# Allegro board fc.brd
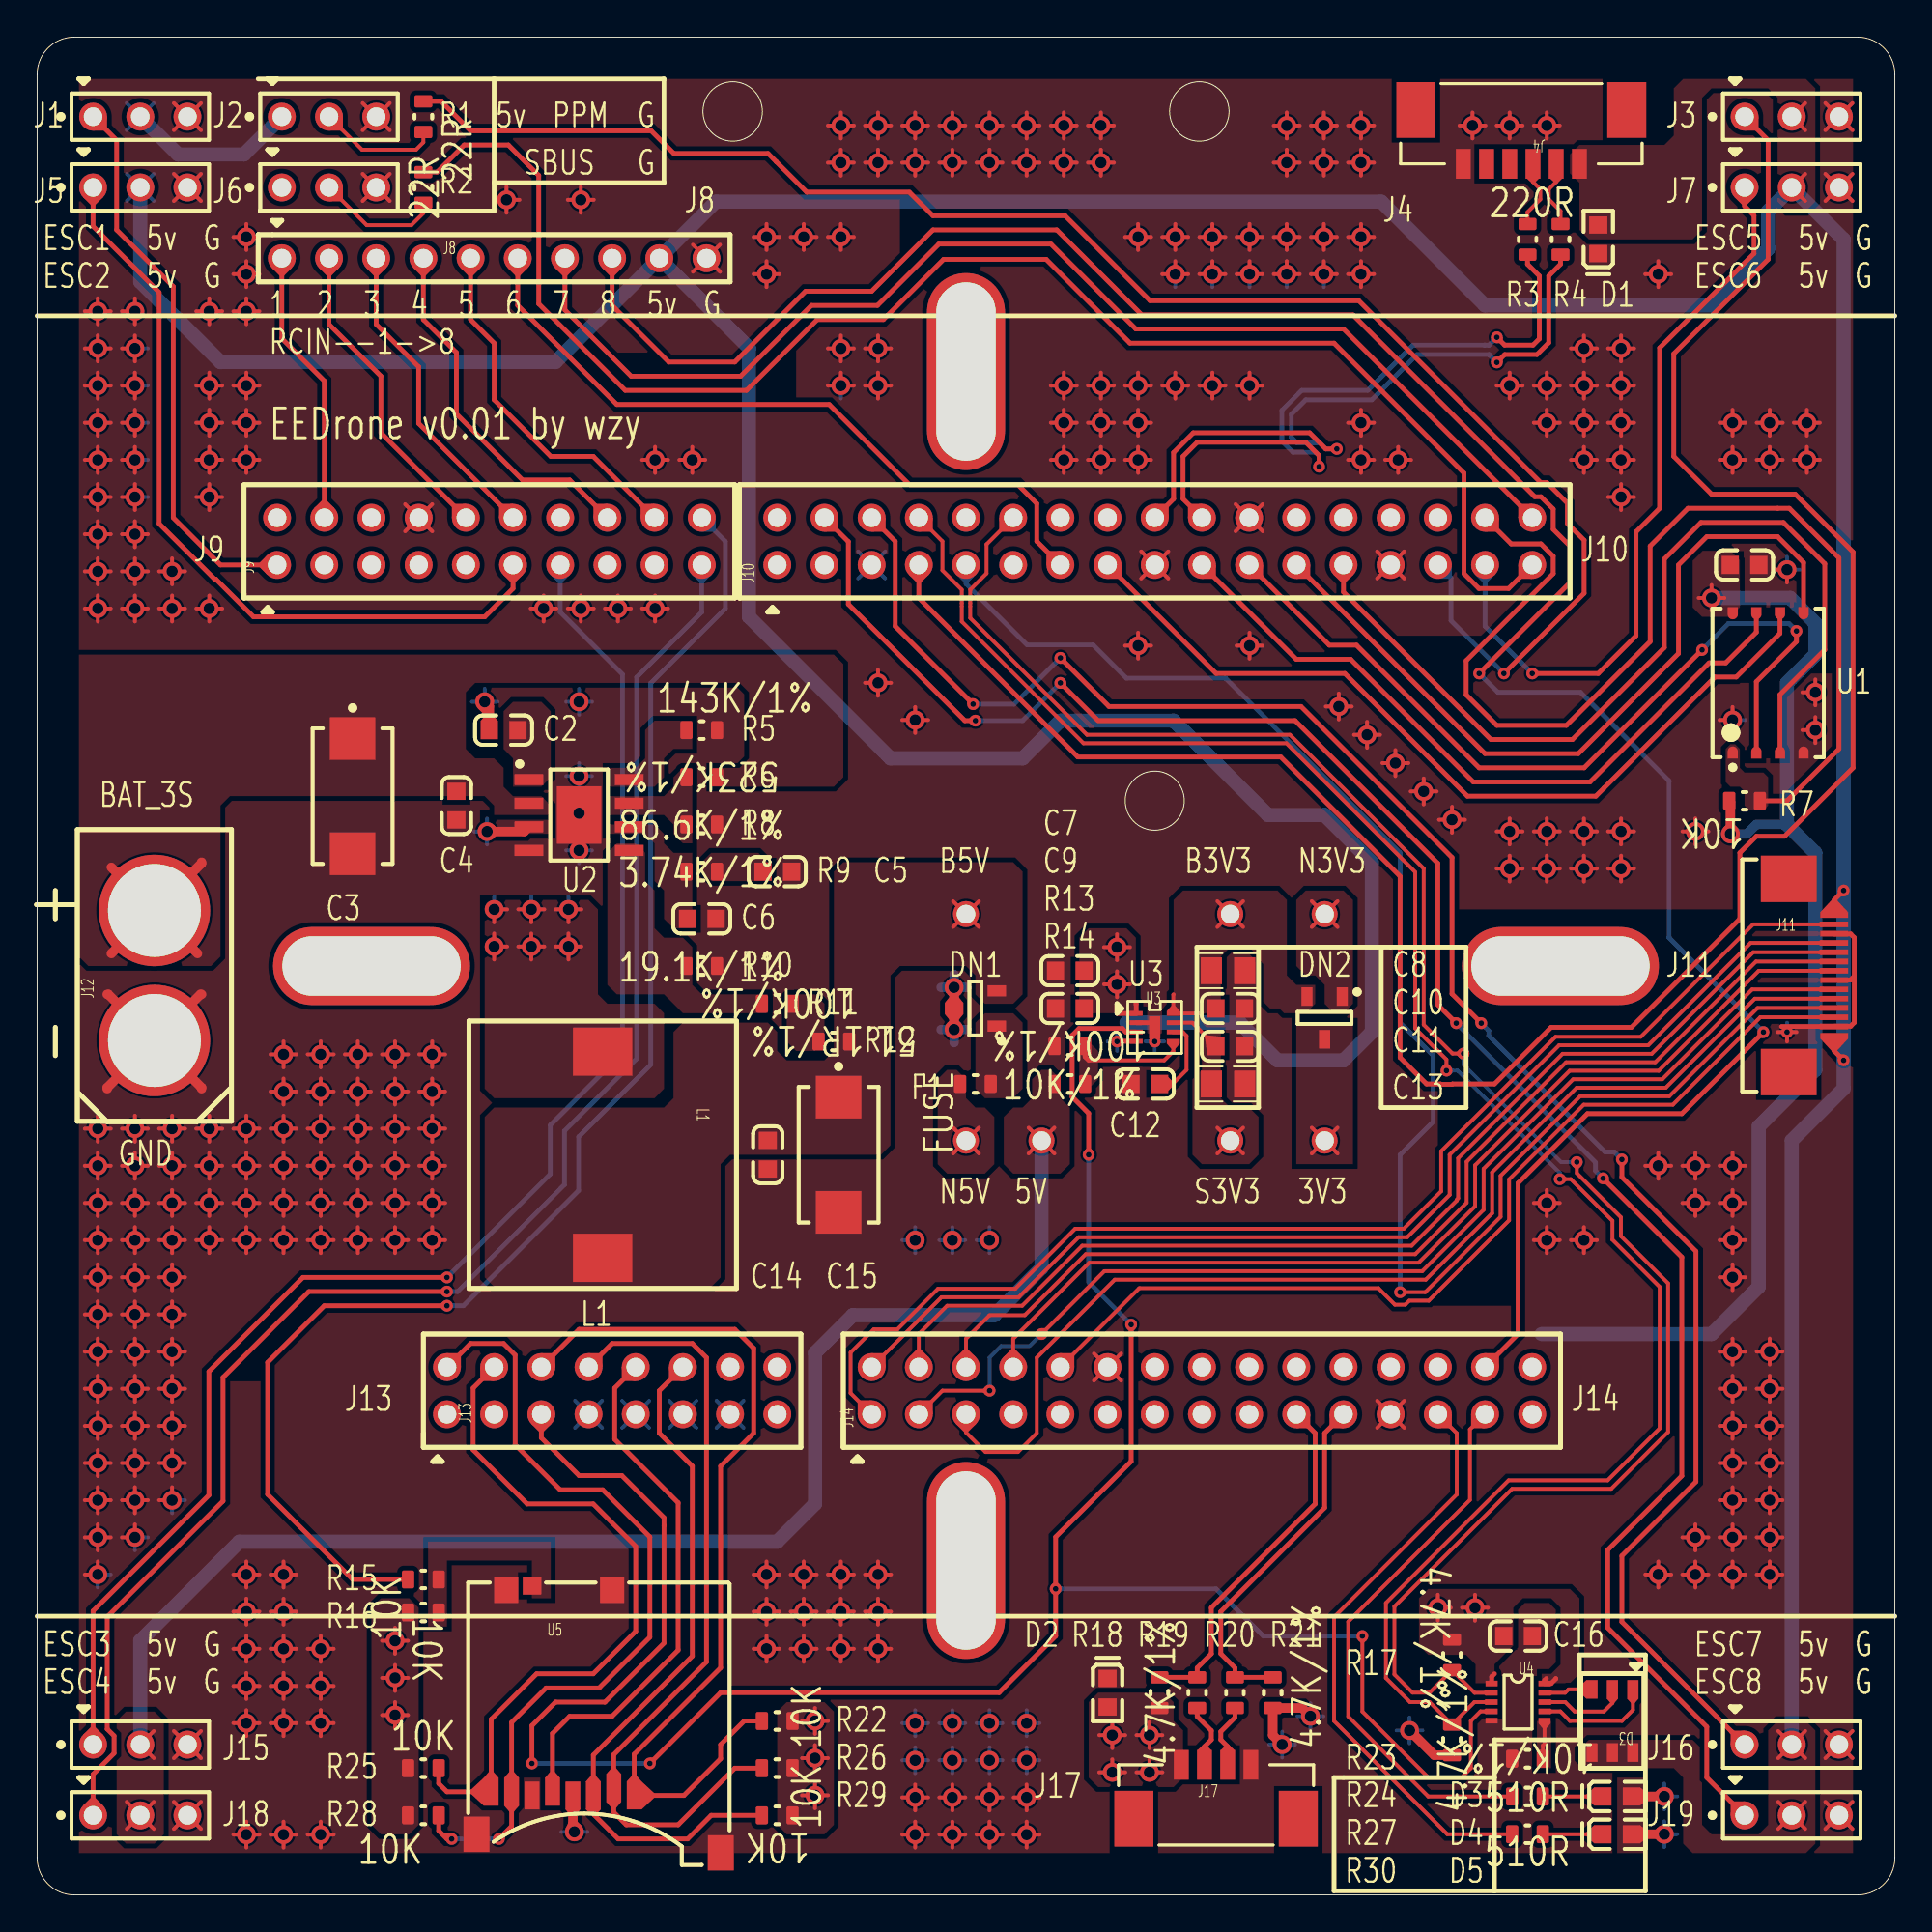
[diagram p0: board, top side]
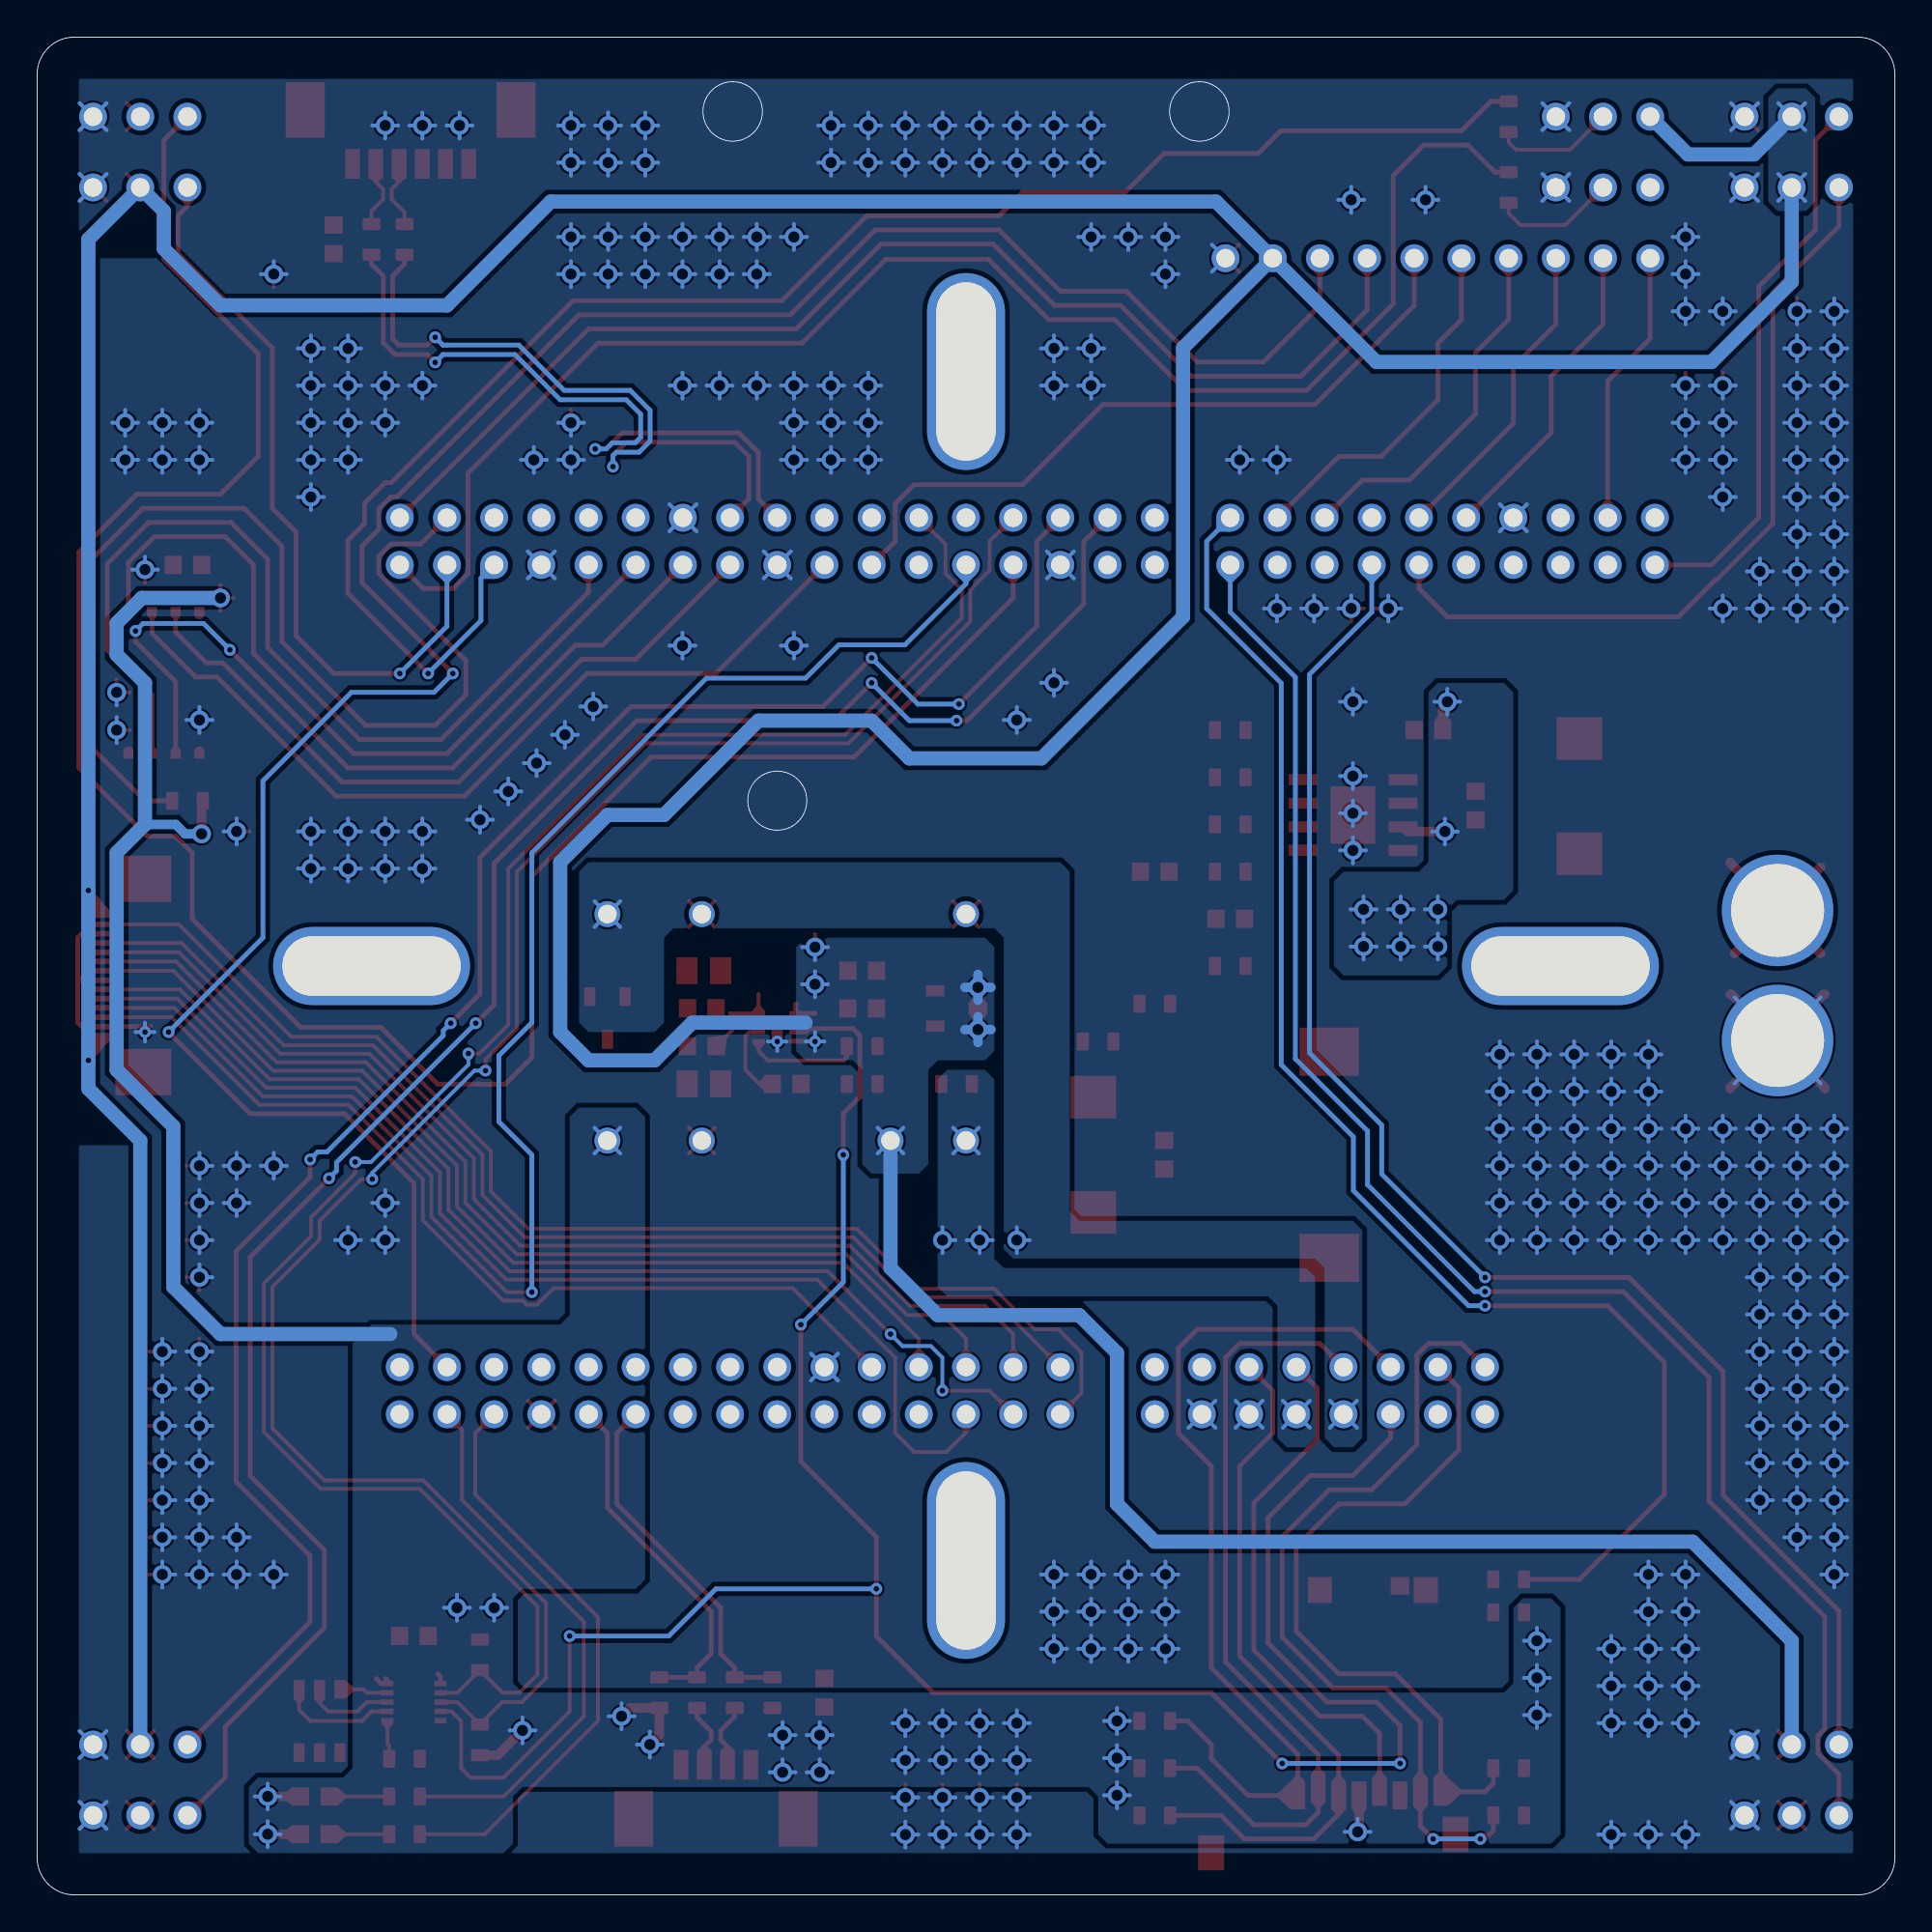
[diagram p1: board, bottom side, seen from below]

Outline 100 x 100 mm; copper layers: TOP, BOTTOM. Coordinates in mm from the lower left corner of the outline.
Outline path: circle c37.44,96 r1.6 ; circle c60.16,58.9 r1.59 ; circle c62.56,96 r1.6 ; 0,98 0,2 arc(0.59,0.59) 2,0 98,0 arc(99.41,0.59) 100,2 100,98 arc(99.41,99.41) 98,100 2,100 arc(0.59,99.41) 0,98

## Design rules (mm)
net group DIFFPAIR0: nets N25219 N25223
net group DIFFPAIR1: nets UART7_RX UART7_TX
net group DIFFPAIR2: nets N25610 N25614
net group DIFFPAIR3: nets IIC2_SCL IIC2_SDA
net group DIFFPAIR4: nets IIC4_SCL IIC4_SDA

## Placement (name value [footprint] x y rotation side)
C1  0.1uF  [CAP0603]  91.91 71.59 0 top
C2  0.1uF/50V  [CAP0603]  25.11 62.7 180 top
C3  100uF/25V  [CAPMP7343X430N]  16.98 59.14 270 top
C4  0.1uF/50V  [CAP0603]  22.57 58.64 270 top
C5  12nF/16V  [CAP0603]  39.84 55.08 0 top
C6  120pF/50V  [CAP0603]  35.78 52.54 0 top
C7  10uF/25V  [CAP0603]  55.59 49.75 180 top
C8  22uF/25V  [CAP0805]  63.21 49.75 0 top
C9  0.1uF/50V  [CAP0603]  55.59 47.71 180 top
C10  0.1uF/50V  [CAP0603]  64.22 47.71 0 top
C11  0.1uF/50V  [CAP0603]  64.22 45.68 0 top
C12  0.01uF/50V  [CAP0603]  59.65 43.65 180 top
C13  22uF/25V  [CAP0805]  63.21 43.65 0 top
C14  0.1uF/50V  [CAP0603]  39.33 39.84 270 top
C15  100uF/16V  [CAPMP7343X430N]  43.14 39.84 270 top
C16  0.1uF  [CAP0603]  79.72 13.93 0 top
D1  TVS202-XGD10603  [LED0603]  84.04 89.12 90 top
D2  TVS202-XGD10603  [LED0603]  57.62 10.88 270 top
D3  3LEDs  [LED3535]  84.8 9.36 180 top
D4  LED  [LED0603]  85.05 5.3 0 top
D5  LED  [LED0603]  85.05 3.26 0 top
DN1  PMEG2005CT  [PMEG2005CT_TO-236AB]  50.51 47.71 180 top
DN2  PMEG2005CT  [PMEG2005CT_TO-236AB]  69.3 47.21 270 top
F1  FUSE  [RES0603]  50.51 43.65 180 top
J1  HEADER 3  [HEADER3X1_254]  3.01 95.72 0 top
J2  HEADER 3  [HEADER3X1_254]  13.17 95.72 0 top
J3  HEADER 3  [HEADER3X1_254]  91.91 95.72 0 top
J4  HEADER 6  [J_JAT_A1250WV_S-06P]  83.02 93.18 180 top
J5  HEADER 3  [HEADER3X1_254]  3.01 91.91 0 top
J6  HEADER 3  [HEADER3X1_254]  13.17 91.91 0 top
J7  HEADER 3  [HEADER3X1_254]  91.91 91.91 0 top
J8  RC_IN  [HEADER10X1_254]  24.6 88.1 0 top
J9  HEADER 10X2  [HEADER2X10_254]  24.35 72.86 90 top
J10  HEADER 17X2  [HEADER2X17_254]  60.16 72.86 90 top
J11  FPC  [FPC14_PITCH0_50]  96.74 49.49 0 top
J12  BAT_3S  [XT60]  6.31 49.49 90 top
J13  HEADER 8X2  [HEADER8X2_254]  30.95 27.14 90 top
J14  HEADER 15X2  [HEADER2X15_254]  62.7 27.14 90 top
J15  HEADER 3  [HEADER3X1_254]  3.01 8.09 0 top
J16  HEADER 3  [HEADER3X1_254]  91.91 8.09 0 top
J17  HEADER 4  [J_JAT_A1250WV_S-04P]  63.46 5.55 0 top
J18  HEADER 3  [HEADER3X1_254]  3.01 4.28 0 top
J19  HEADER 3  [HEADER3X1_254]  91.91 4.28 0 top
L1  15uH/4.7A  [SLF12575T-150M4R7]  30.44 39.84 270 top
NOREF  -  []  2 98 0 top
NOREF#2  -  [unnamed#2]  50 82 90 top
NOREF#3  -  []  2 2 90 top
NOREF#4  -  []  0.54 99.36 0 top
NOREF#5  -  [unnamed#2]  50 18 90 top
NOREF#6  -  [unnamed#2]  18 50 0 top
NOREF#7  -  [unnamed#2]  82 50 0 top
R1  22R  [RES0603]  20.79 95.72 90 top
R2  22R  [RES0603]  20.79 91.91 90 top
R3  220R  [RES0603]  80.23 89.12 90 top
R4  220R  [RES0603]  82 89.12 90 top
R5  143K/1%  [RES0603]  35.78 62.7 0 top
R6  523K/1%  [RES0603]  35.78 60.16 180 top
R7  10K  [RES0603]  91.91 58.89 180 top
R8  86.6K/1%  [RES0603]  35.78 57.62 0 top
R9  3.74K/1%  [RES0603]  35.78 55.08 0 top
R10  19.1K/1%  [RES0603]  35.78 50 0 top
R11  100K/1%  [RES0603]  39.84 47.97 180 top
R12  51.1R/1%  [RES0603]  42.89 45.94 180 top
R13  100K/1%  [RES0603]  55.59 45.68 180 top
R14  10K/1%  [RES0603]  55.59 43.65 0 top
R15  10K  [RES0603]  20.79 16.98 180 top
R16  10K  [RES0603]  20.79 15.2 0 top
R17  4.7K/1%  [RES0603]  76.16 12.92 270 top
R18  4.7K/1%  [RES0603]  60.41 10.88 90 top
R19  220R  [RES0603]  62.45 10.88 270 top
R20  220R  [RES0603]  64.48 10.88 270 top
R21  4.7K/1%  [RES0603]  66.51 10.88 90 top
R22  10K  [RES0603]  39.84 9.36 180 top
R23  4.7K/1%  [RES0603]  76.16 8.34 90 top
R24  10K/1%  [RES0603]  80.23 7.33 180 top
R25  10K  [RES0603]  20.79 6.82 0 top
R26  10K  [RES0603]  39.84 6.82 180 top
R27  510R  [RES0603]  80.23 5.3 0 top
R28  10K  [RES0603]  20.79 4.28 0 top
R29  10K  [RES0603]  39.84 4.28 180 top
R30  510R  [RES0603]  80.23 3.26 0 top
TP1  T POINT R  [TESTPOINT]  64.22 52.79 0 top
TP2  T POINT R  [TESTPOINT]  50 52.79 0 top
TP3  T POINT R  [TESTPOINT]  69.3 52.79 0 top
TP4  T POINT R  [TESTPOINT]  50 40.6 0 top
TP5  T POINT R  [TESTPOINT]  54.06 40.6 0 top
TP6  T POINT R  [TESTPOINT]  64.22 40.6 0 top
TP7  T POINT R  [TESTPOINT]  69.3 40.6 0 top
U1  MX25L51245G  [MX25L51245G_WSON8]  93.18 65.24 90 top
U2  TPS54335ADDAR  [TPS54335A_SOP8POWER]  29.17 58.13 0 top
U3  MIC5332-3.3/3.3YMT  [MIC5532_MLF8]  60.16 46.7 0 top
U4  TCA62724FMG  [TCA62724FMG_SON10]  79.72 10.38 0 top
U5  molex_microsd  [MOLEX_MICROSD]  24.6 15.71 0 top

## Library data of the parts
C1 C2 C4-C14 C16 = CAP NP
C3 C15 = CAP POL
D1 D2 = DIODE BI-DIR TRIG
D3 = 3LEDs_0
D4 D5 = LED
DN1 DN2 = DIODE_DUAL_CK_AAJ
F1 = FUSE: Tolerance: RichardLC; User Part Number: partnum
J1-J3 J5-J7 J15 J16 J18 J19 = HEADER 3
J4 = HEADER 6
J8 = HEADER 10
J9 = HEADER 10X2
J10 = HEADER 17X2
J11 = HEADER 14
J12 = HEADER 2
J13 = HEADER 8X2
J14 = HEADER 15X2
J17 = HEADER 4
L1 = INDUCTOR
R1-R30 = R: Tolerance: RichardLC; User Part Number: partnum
TP1-TP7 = T POINT R
U1 = MX25L51245G
U2 = TPS54335ADDAR_1
U3 = MIC5332-3.3/3.3YMT
U4 = TCA62724FMG
U5 = molex_microsd

## Footprints (pads in the part's own frame, mm; a bottom-side part is the same pattern mirrored in y, then rotated)
CAP0603
  rect 0.93x0.98 smd: 1(-0.77,0) 2(0.77,0)
CAP0805
  rect 1.143x1.448 smd: 1(0,0) 2(1.8,0)
CAPMP7343X430N
  rect 2.3x2.45 smd: 1(-3.1,0) 2(3.1,0)
FPC14_PITCH0_50
  rect 3x2.5 smd: (-2.45,5.2) (-2.45,-5.2)
  rect 1.5x0.3 smd: 1(0,3.25) 2(0,2.75) 3(0,2.25) 4(0,1.75) 5(0,1.25) 6(0,0.75) 7(0,0.25) 8(0,-0.25) 9(0,-0.75) 10(0,-1.25) 11(0,-1.75) 12(0,-2.25) 13(0,-2.75) 14(0,-3.25)
HEADER2X10_254
  round 1.5 hole 1: 1(-1.27,11.43) 2(1.27,11.43) 3(-1.27,8.89) 4(1.27,8.89) 5(-1.27,6.35) 6(1.27,6.35) 7(-1.27,3.81) 8(1.27,3.81) 9(-1.27,1.27) 10(1.27,1.27) 11(-1.27,-1.27) 12(1.27,-1.27) 13(-1.27,-3.81) 14(1.27,-3.81) 15(-1.27,-6.35) 16(1.27,-6.35) 17(-1.27,-8.89) 18(1.27,-8.89) 19(-1.27,-11.43) 20(1.27,-11.43)
HEADER2X15_254
  round 1.5 hole 1: 1(-1.27,17.78) 2(1.27,17.78) 3(-1.27,15.24) 4(1.27,15.24) 5(-1.27,12.7) 6(1.27,12.7) 7(-1.27,10.16) 8(1.27,10.16) 9(-1.27,7.62) 10(1.27,7.62) 11(-1.27,5.08) 12(1.27,5.08) 13(-1.27,2.54) 14(1.27,2.54) 15(-1.27,0) 16(1.27,0) 17(-1.27,-2.54) 18(1.27,-2.54) 19(-1.27,-5.08) 20(1.27,-5.08) 21(-1.27,-7.62) 22(1.27,-7.62) 23(-1.27,-10.16) 24(1.27,-10.16) 25(-1.27,-12.7) 26(1.27,-12.7) 27(-1.27,-15.24) 28(1.27,-15.24) 29(-1.27,-17.78) 30(1.27,-17.78)
HEADER2X17_254
  round 1.5 hole 1: 1(-1.27,20.32) 2(1.27,20.32) 3(-1.27,17.78) 4(1.27,17.78) 5(-1.27,15.24) 6(1.27,15.24) 7(-1.27,12.7) 8(1.27,12.7) 9(-1.27,10.16) 10(1.27,10.16) 11(-1.27,7.62) 12(1.27,7.62) 13(-1.27,5.08) 14(1.27,5.08) 15(-1.27,2.54) 16(1.27,2.54) 17(-1.27,0) 18(1.27,0) 19(-1.27,-2.54) 20(1.27,-2.54) 21(-1.27,-5.08) 22(1.27,-5.08) 23(-1.27,-7.62) 24(1.27,-7.62) 25(-1.27,-10.16) 26(1.27,-10.16) 27(-1.27,-12.7) 28(1.27,-12.7) 29(-1.27,-15.24) 30(1.27,-15.24) 31(-1.27,-17.78) 32(1.27,-17.78) 33(-1.27,-20.32) 34(1.27,-20.32)
HEADER3X1_254
  round 1.5 hole 1: 1(0,0) 2(2.54,0) 3(5.08,0)
HEADER8X2_254
  round 1.5 hole 1: 1(-1.27,8.89) 2(1.27,8.89) 3(-1.27,6.35) 4(1.27,6.35) 5(-1.27,3.81) 6(1.27,3.81) 7(-1.27,1.27) 8(1.27,1.27) 9(-1.27,-1.27) 10(1.27,-1.27) 11(-1.27,-3.81) 12(1.27,-3.81) 13(-1.27,-6.35) 14(1.27,-6.35) 15(-1.27,-8.89) 16(1.27,-8.89)
HEADER10X1_254
  round 1.5 hole 1: 1(-11.43,0) 2(-8.89,0) 3(-6.35,0) 4(-3.81,0) 5(-1.27,0) 6(1.27,0) 7(3.81,0) 8(6.35,0) 9(8.89,0) 10(11.43,0)
J_JAT_A1250WV_S-04P
  rect 2.1x3 smd: (-4.425,-1.45) (4.425,-1.45)
  rect 0.8x1.6 smd: 1(-1.875,1.45) 2(-0.625,1.45) 3(0.625,1.45) 4(1.875,1.45)
J_JAT_A1250WV_S-06P
  rect 2.1x3 smd: (-2.55,-2.9) (8.8,-2.9)
  rect 0.8x1.6 smd: 1(0,0) 2(1.25,0) 3(2.5,0) 4(3.75,0) 5(5,0) 6(6.25,0)
LED0603
  rect 0.93x0.98 smd: 1(-0.77,0) 2(0.77,0)
LED3535
  rect 0.6x1 smd: 1(-1.1,-1.7) 2(0,-1.7) 3(1.1,-1.7) 4(1.1,1.7) 5(0,1.7) 6(-1.1,1.7)
MIC5532_MLF8
  rect 0.7x0.25 smd: 1(-1,0.75) 2(-1,0.25) 3(-1,-0.25) 4(-1,-0.75) 5(1,-0.75) 6(1,-0.25) 7(1,0.25) 8(1,0.75)
  rect 0.6x1.2 smd: 9(0,0)
MOLEX_MICROSD
  rect 0.8x1.5 smd: 1(7.54,-10.36) 2(6.44,-9.96) 3(5.34,-10.36) 4(4.24,-10.36) 5(3.14,-10.16) 6(2.04,-10.36) 7(0.94,-10.16) 8(-0.16,-10.16)
  rect 1.4x1.9 smd: 9(-0.95,-12.45) 10(12.2,-13.45)
  rect 1.3x1.4 smd: 11(0.65,0.7) 12(6.35,0.7)
  rect 1x0.95 smd: 13(2.04,0.925)
MX25L51245G_WSON8
  custom 0.65x0.55 smd: 1(-3.75,1.905) 2(-3.75,0.635) 3(-3.75,-0.635) 4(-3.75,-1.905) 5(3.75,-1.905) 6(3.75,-0.635) 7(3.75,0.635) 8(3.75,1.905)
PMEG2005CT_TO-236AB
  rect 1x0.6 smd: 1(-1.15,0.95) 2(-1.15,-0.95) 3(1.15,0)
RES0603
  custom 0.66x0.966 smd: 1(-0.825,0) 2(0.825,0)
SLF12575T-150M4R7
  rect 2.6x3.2 smd: 1(-5.55,0) 2(5.55,0)
TCA62724FMG_SON10
  rect 0.65x0.3 smd: 1(-1.425,1) 2(-1.425,0.5) 3(-1.425,0) 4(-1.425,-0.5) 5(-1.425,-1) 6(1.425,-1) 7(1.425,-0.5) 8(1.425,0) 9(1.425,0.5) 10(1.425,1)
TESTPOINT
  round 1.4 hole 1: 1(0,0)
TPS54335A_SOP8POWER
  rect 1.55x0.6 smd: 1(-2.7,1.905) 2(-2.7,0.635) 3(-2.7,-0.635) 4(-2.7,-1.905) 5(2.7,-1.905) 6(2.7,-0.635) 7(2.7,0.635) 8(2.7,1.905)
  rect 2.4x3.1 smd: 9(0,0)
unnamed#2
  oval 10.6x4.2 hole 9.6x3.2 unplated: (0,0)
XT60
  round 6 hole 5: 1(-3.5,0) 2(3.5,0)

## Nets
+3V3: C1.1 C16.1 D2.2 D4.2(ANODE) D5.2(ANODE) DN2.3 J17.1 R7.2 R16.1 R17.1 R18.1 R21.1 R22.1 R23.1 R25.1 R26.1 R28.1 R29.1 TP7.1(TP) U1.8(VCC) U4.1(SHDN) U4.10(VIN) U5.4(VDD)
+5V: C7.1 C9.1 D1.2 D3.4(IN1+) D3.5(IN2+) D3.6(IN3+) DN1.3 J1.2 J2.1 J3.2 J4.1 J5.2 J7.2 J8.9 J11.1 J11.14 J15.2 J16.2 J18.2 J19.2 R14.1 TP5.1(TP) U3.1(VIN) U3.4(EN2)
AVDD: J9.6
GND: C1.2 C3.2 C4.2 C5.2 C6.2 C7.2 C8.2 C9.2 C10.2 C11.2 C12.2 C13.2 C14.2 C15.2 C16.2 D1.1 D2.1 J1.3 J2.3 J3.3 J4.6 J5.3 J6.3 J7.3 J8.10 J9.8 J10.5 J10.17 J10.22 J10.27 J11.3 J11.8 J11.13 J12.1 J13.11 J13.13 J14.12 J14.23 J15.3 J16.3 J17.4 J18.3 J19.3 R5.2 R8.2 R10.2 R13.2 R24.2 U1.4(GND) U2.4(GND) U2.9(PAD) U3.2(GND1) U3.9(GND2) U4.5(GND) U5.6(VSS) U5.9(GND1) U5.10(GND2) U5.11(GND3) U5.12(GND4)
VIN: J13.15
BAT_3S: C3.1 C4.1 J12.2 R6.1 U2.2(VIN)
BAT_3V3: C8.1 C10.1 DN2.2 TP1.1(TP) U3.8(VOUT1)
BAT_5V: C14.1 C15.1 DN1.2 L1.2 R12.1 TP2.1(TP)
ESC1_PWM: J1.1 J9.1
ESC2_PWM: J5.1 J9.11
ESC3_PWM: J9.13 J15.1
ESC4_PWM: J9.19 J18.1
ESC5_PWM: J3.1 J10.7
ESC6_PWM: J7.1 J10.31
ESC7_PWM: J10.6 J16.1
ESC8_PWM: J10.4 J19.1
IIC2_SCL: J14.19 R18.2 R19.1
IIC2_SDA: J14.21 R20.1 R21.2
IIC4_SCL: J10.8 R23.2 U4.3(SCL)
IIC4_SDA: J10.12 R17.2 U4.2(SDA)
IMU_6DSM_CS: J11.6 J14.6
IMU_6DSM_INT: J11.9 J14.3
IMU_303D_CS: J11.5 J14.4
IMU_ICM_CS: J11.7 J14.8
IMU_LPS_CS: J11.4 J14.2
IMU_PWM: J11.2 J14.1
LED0: J14.25 R30.1
LED1: J14.27 R27.1
NRST: J13.5 U3.3(POR2) U4.4(RESET)
NUC_3V3: DN2.1 J13.7 TP3.1(TP)
NUC_5V: F1.2 J13.9 TP4.1(TP)
PA4: J9.17
PA7: J9.14
PA15: J9.9
PB3: J9.15
PB8: J9.2
PB12: J9.7
PB13: J9.5
PB15: J9.3
PE3: J14.22
PE4: J14.16
PE5: J14.18
PE6: J14.20
PE10: J10.24
PE12: J10.26
PE13: J10.10
PE14: J10.28
PE15: J10.30
PF7: J14.26
PF8: J14.24
PF13: J10.2
PG0: J14.29
PG1: J14.30
PG2: J13.14
PG3: J13.16
PPM_IN: J10.29 R1.2
QSPI_CS: J10.32 R7.1 U1.1(CS#)
QSPI_D0: J10.23 U1.5(SIO0/SI)
QSPI_D1: J10.21 U1.2(SIO1/SO)
QSPI_D2: J10.25 U1.3(SIO2/WP#)
QSPI_D3: J10.19 U1.7(SIO3/RESET#)
QSPI_SCK: J10.15 U1.6(SCLK)
RC_IN1: J8.1 J9.4
RC_IN2: J8.2 J9.10
RC_IN3: J8.3 J9.12
RC_IN4: J8.4 J9.16
RC_IN5: J8.5 J9.18
RC_IN6: J8.6 J10.13
RC_IN7: J8.7 J10.34
RC_IN8: J8.8 J14.28
SBUS: J10.33 R2.2
SD_CD: J9.20 R15.2
SD_CLK: J13.10 U5.5(CLK/SCLK)
SD_CMD: J13.12 R29.2 U5.3(CMD/DI)
SD_D0: J13.2 R28.2 U5.7(DAT0/D0)
SD_D1: J13.4 R25.2 U5.8(DAT1/RSV)
SD_D2: J13.6 R22.2 U5.1(DAT2/RSV)
SD_D3: J13.8 R26.2 U5.2(CD/DAT3/CS)
SENSOR_3V3: C11.1 C13.1 TP6.1(TP) U3.7(VOUT2)
SPI2_MISO: J10.9 J11.11
SPI2_MOSI: J11.10 J14.5
SPI2_SCK: J11.12 J14.10
UART7_RX: J10.20 R3.1
UART7_TX: J10.18 R4.1
N17118: J2.2 R1.1
N17345: J6.2 R2.1
N18384: D3.3(IN1-) U4.9(OUT0)
N18423: D3.2(IN2-) U4.8(OUT1)
N18617: D3.1(IN3-) U4.7(OUT2)
N22861: R24.1 U4.6(REXT)
N25219: J4.2 R4.2
N25223: J4.3 R3.2
N25610: J17.2 R19.2
N25614: J17.3 R20.2
N28626: D5.1(CATHODE) R30.2
N28630: D4.1(CATHODE) R27.2
N29554: R15.1 R16.2 U5.13(NCD)
N34885: R6.2 R8.1 U2.7(EN)
N35030: R5.1 U2.8(RT)
N35279: C6.1 R9.1 U2.6(COMP)
N35287: C5.1 R9.2
N35410: C2.1 U2.1(BOOT)
N35439: C2.2 L1.1 U2.3(PH)
N35979: R11.1 R12.2
N35983: R10.1 R11.2 U2.5(VSNS)
N39122: C12.1 U3.6(CSET)
N39384: R13.1 R14.2 U3.5(EN1)
N41172: DN1.1 F1.1

Pads without a net: J4 4 5; J6 1; J10 1 3 11 14 16; J13 1 3; J14 7 9 11 13 14 15 17

## Via types
v1: diameter 0.635, hole 0.305, TOP to BOTTOM, 41 vias
v2: diameter 1.016, hole 0.61, TOP to BOTTOM, 326 vias

## Routing (per net, layer and track width the routed paths; a pad name or vN(x,y) marks a point on that pad's centre or on a via; arc(x,y) is an arc through that point)
+3V3: length 190
  TOP w0.203: v2(59.87,6.6) 60.57,6.6 ; v2(59.87,6.6) 59.18,6.6 ; v2(59.87,6.6) 59.87,7.3 ; 76.7,15.46 v2(77.4,15.46) ; v2(77.4,15.46) 77.4,16.15 ; v2(77.4,15.46) 77.4,14.76 ; v2(77.4,15.46) 78.1,15.46 ; 75.4,14.76 v2(75.4,15.46) ; v2(75.4,15.46) 76.1,15.46 ; v2(75.4,15.46) 74.7,15.46 ; v2(75.4,15.46) 75.4,16.15 ; v2(19.27,9.68) 19.27,10.38 ; v2(19.27,9.68) 19.27,8.98 ; v2(19.27,9.68) 19.96,9.68 ; v2(19.27,9.68) 18.57,9.68 ; 41.17,7.36 v2(41.87,7.36) ; v2(41.87,7.36) 42.57,7.36 ; v2(41.87,7.36) 41.87,6.66 ; v2(41.87,7.36) 41.87,8.06 ; 57.18,8.6 v2(57.87,8.6) ; v2(57.87,8.6) 58.57,8.6 ; v2(57.87,8.6) 57.87,7.9 ; v2(57.87,8.6) 57.87,9.3 ; 41.87,4.66 v2(41.87,5.36) ; v2(41.87,5.36) 41.87,6.06 ; v2(41.87,5.36) 41.17,5.36 ; v2(41.87,5.36) 42.57,5.36 ; 41.87,8.66 v2(41.87,9.36) ; v2(41.87,9.36) 41.17,9.36 ; v2(41.87,9.36) 41.87,10.06 ; v2(41.87,9.36) 42.57,9.36 ; v2(90.13,69.81) 90.83,69.81 ; v2(90.13,69.81) 90.13,70.51 ; v2(90.13,69.81) 90.13,69.11 ; v2(90.13,69.81) 89.43,69.81 ; v2(57.87,6.6) 58.57,6.6 ; v2(57.87,6.6) 57.87,7.3 ; v2(57.87,6.6) 57.18,6.6 ; v2(59.87,8.6) 59.87,9.3 ; v2(59.87,8.6) 59.87,7.9 ; v2(59.87,8.6) 59.18,8.6 ; v2(59.87,8.6) 60.57,8.6 ; TP7.1 70,41.3 ; TP7.1 68.61,39.91 ; TP7.1 70,39.91 ; TP7.1 68.61,41.3 ; 18.57,11.68 v2(19.27,11.68) ; v2(19.27,11.68) 19.27,12.38 ; v2(19.27,11.68) 19.27,10.98 ; v2(19.27,11.68) 19.96,11.68 ; v2(19.27,13.68) 19.96,13.68 ; v2(19.27,13.68) 19.27,14.38 ; v2(19.27,13.68) 19.27,12.98 ; v2(19.27,13.68) 18.57,13.68
  TOP w0.254: U4.1 78.29,11.74 78.45,11.9 ; 81.24,11.65 81.14,11.55 U4.10 81.5,11.38 81.75,11.63 81.75,11.65
  TOP w0.508: v2(68.54,9.61) 68.1,10.06 R21.1 66.51,8.6 v2(67.02,8.09) ; v2(87.59,5.3) D4.2 ; v2(73.88,8.85) 75.21,7.52 R23.1 ; R7.2 91.15,58.83 v2(91.15,57.11) ; U5.4 28.84,3.43 28.88,3.39 v2(28.92,3.39) ; D5.2 v2(87.59,3.26)
  BOTTOM w0.203: v2(87.59,3.26) 88.29,3.26 ; v2(87.59,3.26) 87.59,3.96 ; v2(87.59,3.26) 86.89,3.26 ; v2(87.59,3.26) 87.59,2.57 ; v2(53.26,7.24) 53.96,7.24 ; v2(53.26,7.24) 52.57,7.24 ; v2(53.26,7.24) 53.26,6.55 ; v2(53.26,7.24) 53.26,7.94 ; 41.87,4.66 v2(41.87,5.36) ; v2(41.87,5.36) 42.57,5.36 ; v2(41.87,5.36) 41.87,6.06 ; v2(41.87,5.36) 41.17,5.36 ; 19.27,10.98 v2(19.27,11.68) ; v2(19.27,11.68) 19.96,11.68 ; v2(19.27,11.68) 18.57,11.68 ; v2(19.27,11.68) 19.27,12.38 ; v2(75.4,15.46) 76.1,15.46 ; v2(75.4,15.46) 75.4,14.76 ; v2(75.4,15.46) 75.4,16.15 ; v2(75.4,15.46) 74.7,15.46 ; 18.57,9.68 v2(19.27,9.68) ; v2(19.27,9.68) 19.27,10.38 ; v2(19.27,9.68) 19.27,8.98 ; v2(19.27,9.68) 19.96,9.68 ; v2(57.87,8.6) 57.87,9.3 ; v2(57.87,8.6) 58.57,8.6 ; v2(57.87,8.6) 57.87,7.9 ; v2(57.87,8.6) 57.18,8.6 ; 52.57,9.24 v2(53.26,9.24) ; v2(53.26,9.24) 53.96,9.24 ; v2(53.26,9.24) 53.26,8.55 ; v2(53.26,9.24) 53.26,9.94 ; v2(49.26,9.24) 49.96,9.24 ; v2(49.26,9.24) 49.26,8.55 ; v2(49.26,9.24) 48.57,9.24 ; v2(49.26,9.24) 49.26,9.94 ; 67.84,9.61 v2(68.54,9.61) ; v2(68.54,9.61) 68.54,10.31 ; v2(68.54,9.61) 69.24,9.61 ; v2(68.54,9.61) 68.54,8.92 ; v2(59.87,6.6) 59.87,7.3 ; v2(59.87,6.6) 59.18,6.6 ; v2(59.87,6.6) 60.57,6.6 ; 28.22,3.39 v2(28.92,3.39) ; v2(28.92,3.39) 29.62,3.39 ; v2(28.92,3.39) 28.92,4.09 ; 47.26,8.55 v2(47.26,9.24) ; v2(47.26,9.24) 47.96,9.24 ; v2(47.26,9.24) 46.57,9.24 ; v2(47.26,9.24) 47.26,9.94 ; 51.26,8.55 v2(51.26,9.24) ; v2(51.26,9.24) 51.96,9.24 ; v2(51.26,9.24) 50.57,9.24 ; v2(51.26,9.24) 51.26,9.94 ; v2(47.26,7.24) 47.26,7.94 ; v2(47.26,7.24) 46.57,7.24 ; v2(47.26,7.24) 47.26,6.55 ; v2(47.26,7.24) 47.96,7.24 ; 50.57,7.24 v2(51.26,7.24) ; v2(51.26,7.24) 51.26,7.94 ; v2(51.26,7.24) 51.96,7.24 ; v2(51.26,7.24) 51.26,6.55 ; 86.89,5.3 v2(87.59,5.3) ; v2(87.59,5.3) 88.29,5.3 ; v2(87.59,5.3) 87.59,5.99 ; v2(87.59,5.3) 87.59,4.6 ; 19.27,12.98 v2(19.27,13.68) ; v2(19.27,13.68) 19.27,14.38 ; v2(19.27,13.68) 18.57,13.68 ; v2(19.27,13.68) 19.96,13.68 ; v2(49.26,7.24) 49.26,7.94 ; v2(49.26,7.24) 48.57,7.24 ; v2(49.26,7.24) 49.96,7.24 ; v2(49.26,7.24) 49.26,6.55 ; v2(73.88,8.85) 74.57,8.85 ; v2(73.88,8.85) 73.88,8.15 ; v2(73.88,8.85) 73.88,9.55 ; v2(73.88,8.85) 73.18,8.85 ; v2(41.87,7.36) 41.87,8.06 ; v2(41.87,7.36) 41.87,6.66 ; v2(41.87,7.36) 42.57,7.36 ; v2(41.87,7.36) 41.17,7.36 ; 77.4,14.76 v2(77.4,15.46) ; v2(77.4,15.46) 76.7,15.46 ; v2(77.4,15.46) 77.4,16.15 ; v2(77.4,15.46) 78.1,15.46 ; v2(41.87,9.36) 42.57,9.36 ; v2(41.87,9.36) 41.87,8.66 ; v2(41.87,9.36) 41.87,10.06 ; v2(41.87,9.36) 41.17,9.36 ; TP7.1 70,41.3 ; TP7.1 70,39.91 ; TP7.1 68.61,41.3 ; TP7.1 68.61,39.91 ; v2(59.87,8.6) 60.57,8.6 ; v2(59.87,8.6) 59.87,7.9 ; v2(59.87,8.6) 59.18,8.6 ; v2(59.87,8.6) 59.87,9.3 ; v2(67.02,8.09) 67.02,8.79 ; v2(67.02,8.09) 66.32,8.09 ; v2(67.02,8.09) 67.72,8.09 ; v2(67.02,8.09) 67.02,7.39 ; v2(57.87,6.6) 57.87,7.3 ; v2(57.87,6.6) 57.18,6.6 ; v2(57.87,6.6) 58.57,6.6
  BOTTOM w0.508: 94.2,57.62 92.55,57.62 92.04,57.11 v2(91.15,57.11)
  BOTTOM w0.762: v2(90.13,69.81) 94.36,69.81 95.72,68.45 95.72,66.76 94.2,65.24 94.2,57.62 95.72,56.1 95.72,44.41 92.67,41.36 92.67,32.73 90.13,30.19 80.99,30.19
+5V: length 420.4
  TOP w0.203: TP5.1 54.76,41.3 ; TP5.1 54.76,39.91 ; TP5.1 53.37,39.91 ; TP5.1 53.37,41.3 ; 93.72,3.55 J19.2 ; J19.2 93.72,5.01 ; J19.2 95.18,3.55 ; J19.2 95.18,5.01 ; 58.13,48.32 v2(58.13,49.02) ; v2(58.13,49.02) 58.83,49.02 ; v2(58.13,49.02) 57.43,49.02 ; v2(58.13,49.02) 58.13,49.71 ; J16.2 95.18,8.82 ; J16.2 93.72,7.36 ; J16.2 95.18,7.36 ; J16.2 93.72,8.82 ; 4.82,3.55 J18.2 ; J18.2 6.28,3.55 ; J18.2 4.82,5.01 ; J18.2 6.28,5.01 ; 57.43,51.02 v2(58.13,51.02) ; v2(58.13,51.02) 58.13,50.32 ; v2(58.13,51.02) 58.83,51.02 ; v2(58.13,51.02) 58.13,51.71 ; 6.28,7.36 J15.2 6.28,8.82 ; 95.18,92.64 J7.2 95.18,91.18 ; 95.18,96.45 J3.2 95.18,94.99
  TOP w0.254: v1(97.24,54.06) 96.74,53.56 J11.1 ; v1(97.24,44.92) 96.74,45.43 J11.14 ; 58.13,47.46 58.14,47.45 U3.1 59.16,47.95 59.14,47.97 ; U3.4 58.14,45.95 v1(58.13,45.94)
  TOP w0.508: v2(49.36,48.85) DN1.3 v2(49.36,46.58)
  BOTTOM w0.203: 4.82,96.45 J1.2 ; J1.2 6.28,96.45 ; J1.2 4.82,94.99 ; 58.13,48.32 v2(58.13,49.02) ; v2(58.13,49.02) 58.83,49.02 ; v2(58.13,49.02) 58.13,49.71 ; v2(58.13,49.02) 57.43,49.02 ; v2(58.13,51.02) 58.83,51.02 ; v2(58.13,51.02) 57.43,51.02 ; v2(58.13,51.02) 58.13,50.32 ; 57.62,45.94 v1(58.13,45.94) ; v1(58.13,45.94) 58.13,45.43 ; v1(58.13,45.94) 58.64,45.94 ; v1(58.13,45.94) 58.13,46.44 ; J5.2 6.28,91.18 ; J5.2 6.28,92.64 ; J5.2 4.82,91.18 ; J5.2 4.82,92.64 ; 53.37,41.3 TP5.1 ; TP5.1 54.76,41.3 ; TP5.1 54.76,39.91 ; TP5.1 53.37,39.91
  BOTTOM w0.508: v2(49.36,48.85) 48.66,48.85 ; v2(49.36,48.85) 49.36,49.55 ; v2(49.36,48.85) 50.06,48.85 ; v2(49.36,48.85) 49.36,48.15 ; v2(49.36,46.58) 50.06,46.58 ; v2(49.36,46.58) 49.36,47.28 ; v2(49.36,46.58) 49.36,45.88 ; v2(49.36,46.58) 48.66,46.58
  BOTTOM w0.762: J16.2 94.45,40.6 97.24,43.4 v1(97.24,44.92) v1(97.24,54.06) 97.24,89.12 J7.2 93.18,90.64 93.18,88.61 90.13,85.56 77.94,85.56 72.35,91.15 36.54,91.15 J8.9 ; J8.9 38.32,83.27 38.32,68.8 45.94,61.18 53.05,61.18 55.08,63.21 61.18,63.21 66.26,58.13 69.3,58.13 71.84,55.59 71.84,46.44 70.32,44.92 66.76,44.92 64.73,46.95 58.64,46.95 ; J8.9 27.9,82.51 9.87,82.51 5.55,86.83 J5.2 ; J1.2 7.58,93.69 11.14,93.69 J2.1 ; J15.2 5.55,13.68 10.88,19.01 39.84,19.01 41.87,21.04 41.87,29.17 43.9,31.2 51.52,31.2 54.06,33.74 TP5.1
GND: length 1720.5
  TOP w0.203: v2(59.26,67.24) 59.96,67.24 ; v2(59.26,67.24) 59.26,67.94 ; v2(59.26,67.24) 59.26,66.55 ; v2(59.26,67.24) 58.57,67.24 ; v2(55.26,77.24) 55.96,77.24 ; v2(55.26,77.24) 55.26,77.94 ; v2(55.26,77.24) 54.57,77.24 ; v2(55.26,77.24) 55.26,76.55 ; 16.57,35.24 v2(17.26,35.24) ; v2(17.26,35.24) 17.96,35.24 ; v2(17.26,35.24) 17.26,34.55 ; v2(17.26,35.24) 17.26,35.94 ; 4.57,73.24 v2(5.26,73.24) ; v2(5.26,73.24) 5.26,72.55 ; v2(5.26,73.24) 5.26,73.94 ; v2(5.26,73.24) 5.96,73.24 ; v2(45.26,17.24) 45.96,17.24 ; v2(45.26,17.24) 45.26,17.94 ; v2(45.26,17.24) 44.57,17.24 ; v2(45.26,17.24) 45.26,16.55 ; v2(85.26,81.24) 85.26,81.94 ; v2(85.26,81.24) 84.57,81.24 ; v2(85.26,81.24) 85.26,80.55 ; v2(85.26,81.24) 85.96,81.24 ; 11.26,10.55 v2(11.26,11.24) ; v2(11.26,11.24) 11.26,11.94 ; v2(11.26,11.24) 11.96,11.24 ; v2(11.26,11.24) 10.57,11.24 ; v2(21.26,35.24) 21.26,35.94 ; v2(21.26,35.24) 21.96,35.24 ; v2(21.26,35.24) 20.57,35.24 ; v2(21.26,35.24) 21.26,34.55 ; v2(29.26,69.24) 29.96,69.24 ; v2(29.26,69.24) 29.26,68.55 ; v2(29.26,69.24) 29.26,69.94 ; v2(29.26,69.24) 28.57,69.24 ; v2(3.26,73.24) 3.96,73.24 ; v2(3.26,73.24) 3.26,72.55 ; v2(3.26,73.24) 2.57,73.24 ; v2(3.26,73.24) 3.26,73.94 ; 8.57,85.24 v2(9.26,85.24) ; v2(9.26,85.24) 9.26,85.94 ; v2(9.26,85.24) 9.26,84.55 ; v2(9.26,85.24) 9.96,85.24 ; 10.57,79.24 v2(11.26,79.24) ; v2(11.26,79.24) 11.26,78.55 ; v2(11.26,79.24) 11.96,79.24 ; v2(11.26,79.24) 11.26,79.94 ; v2(93.26,79.24) 93.26,79.94 ; v2(93.26,79.24) 93.26,78.55 ; v2(93.26,79.24) 92.57,79.24 ; v2(93.26,79.24) 93.96,79.24 ; v2(71.26,87.24) 71.26,87.94 ; v2(71.26,87.24) 70.57,87.24 ; v2(71.26,87.24) 71.96,87.24 ; v2(71.26,87.24) 71.26,86.55 ; 91.26,62.55 v2(91.26,63.24) ; v2(91.26,63.24) 90.57,63.24 ; v2(91.26,63.24) 91.26,63.94 ; v2(3.26,33.24) 3.96,33.24 ; v2(3.26,33.24) 3.26,32.55 ; v2(3.26,33.24) 2.57,33.24 ; v2(3.26,33.24) 3.26,33.94 ; 2.57,19.24 v2(3.26,19.24) ; v2(3.26,19.24) 3.96,19.24 ; v2(3.26,19.24) 3.26,18.55 ; v2(3.26,19.24) 3.26,19.94 ; v2(81.26,57.24) 81.26,57.94 ; v2(81.26,57.24) 81.26,56.55 ; v2(81.26,57.24) 81.96,57.24 ; v2(81.26,57.24) 80.57,57.24 ; v2(59.26,89.24) 59.96,89.24 ; v2(59.26,89.24) 59.26,88.55 ; v2(59.26,89.24) 58.57,89.24 ; v2(59.26,89.24) 59.26,89.94 ; v2(81.26,55.24) 81.96,55.24 ; v2(81.26,55.24) 81.26,55.94 ; v2(81.26,55.24) 81.26,54.55 ; v2(81.26,55.24) 80.57,55.24 ; 25.26,90.55 v2(25.26,91.24) ; v2(25.26,91.24) 25.96,91.24 ; v2(25.26,91.24) 24.57,91.24 ; v2(25.26,91.24) 25.26,91.94 ; 20.57,45.24 v2(21.26,45.24) ; v2(21.26,45.24) 21.26,44.55 ; v2(21.26,45.24) 21.96,45.24 ; v2(21.26,45.24) 21.26,45.94 ; v2(93.26,77.24) 93.96,77.24 ; v2(93.26,77.24) 93.26,76.55 ; v2(93.26,77.24) 93.26,77.94 ; v2(93.26,77.24) 92.57,77.24 ; 9.26,78.55 v2(9.26,79.24) ; v2(9.26,79.24) 9.96,79.24 ; v2(9.26,79.24) 9.26,79.94 ; v2(9.26,79.24) 8.57,79.24 ; 90.57,33.24 v2(91.26,33.24) ; v2(91.26,33.24) 91.96,33.24 ; v2(91.26,33.24) 91.26,32.55 ; v2(91.26,33.24) 91.26,33.94 ; v2(15.26,43.24) 15.96,43.24 ; v2(15.26,43.24) 15.26,42.55 ; v2(15.26,43.24) 15.26,43.94 ; v2(15.26,43.24) 14.57,43.24 ; v2(49.26,5.24) 49.26,5.94 ; v2(49.26,5.24) 49.96,5.24 ; v2(49.26,5.24) 49.26,4.55 ; v2(49.26,5.24) 48.57,5.24 ; J3.3 97.72,94.99 ; J3.3 96.26,94.99 ; J3.3 96.26,96.45 ; J3.3 97.72,96.45 ; 4.57,41.24 v2(5.26,41.24) ; v2(5.26,41.24) 5.26,40.55 ; v2(5.26,41.24) 5.96,41.24 ; v2(5.26,41.24) 5.26,41.94 ; v2(71.26,93.24) 71.26,93.94 ; v2(71.26,93.24) 71.96,93.24 ; v2(71.26,93.24) 70.57,93.24 ; v2(71.26,93.24) 71.26,92.55 ; v2(3.26,23.24) 3.26,23.94 ; v2(3.26,23.24) 3.96,23.24 ; v2(3.26,23.24) 3.26,22.55 ; v2(3.26,23.24) 2.57,23.24 ; 7.36,7.36 J15.3 ; J15.3 8.82,8.82 ; J15.3 8.82,7.36 ; J15.3 7.36,8.82 ; 90.57,19.24 v2(91.26,19.24) ; v2(91.26,19.24) 91.26,18.55 ; v2(91.26,19.24) 91.96,19.24 ; v2(91.26,19.24) 91.26,19.94 ; v2(5.26,25.24) 5.26,25.94 ; v2(5.26,25.24) 5.26,24.55 ; v2(5.26,25.24) 5.96,25.24 ; v2(5.26,25.24) 4.57,25.24 ; v2(3.26,81.24) 3.26,81.94 ; v2(3.26,81.24) 3.26,80.55 ; v2(3.26,81.24) 3.96,81.24 ; v2(3.26,81.24) 2.57,81.24 ; v2(43.26,89.24) 43.26,89.94 ; v2(43.26,89.24) 43.96,89.24 ; v2(43.26,89.24) 42.57,89.24 ; v2(43.26,89.24) 43.26,88.55 ; v2(11.26,13.24) 11.26,13.94 ; v2(11.26,13.24) 11.26,12.55 ; v2(11.26,13.24) 10.57,13.24 ; v2(11.26,13.24) 11.96,13.24 ; v2(11.26,17.24) 11.96,17.24 ; v2(11.26,17.24) 10.57,17.24 ; v2(11.26,17.24) 11.26,16.55 ; v2(11.26,17.24) 11.26,17.94 ; v2(93.26,19.24) 93.26,19.94 ; v2(93.26,19.24) 93.96,19.24 ; v2(93.26,19.24) 92.57,19.24 ; v2(93.26,19.24) 93.26,18.55 ; v2(70.07,63.97) 70.76,63.97 ; v2(70.07,63.97) 69.37,63.97 ; v2(70.07,63.97) 70.07,64.67 ; v2(70.07,63.97) 70.07,63.27 ; v2(59.26,79.24) 59.26,79.94 ; v2(59.26,79.24) 59.96,79.24 ; v2(59.26,79.24) 59.26,78.55 ; v2(59.26,79.24) 58.57,79.24 ; v2(55.26,95.24) 55.26,95.94 ; v2(55.26,95.24) 55.96,95.24 ; v2(55.26,95.24) 54.57,95.24 ; v2(55.26,95.24) 55.26,94.55 ; 90.57,79.24 v2(91.26,79.24) ; v2(91.26,79.24) 91.26,78.55 ; v2(91.26,79.24) 91.96,79.24 ; v2(91.26,79.24) 91.26,79.94 ; v2(5.26,37.24) 5.96,37.24 ; v2(5.26,37.24) 5.26,37.94 ; v2(5.26,37.24) 5.26,36.55 ; v2(5.26,37.24) 4.57,37.24 ; v2(91.26,21.24) 91.96,21.24 ; v2(91.26,21.24) 91.26,20.55 ; v2(91.26,21.24) 90.57,21.24 ; v2(91.26,21.24) 91.26,21.94 ; 71.59,61.75 v2(71.59,62.45) ; v2(71.59,62.45) 72.29,62.45 ; v2(71.59,62.45) 71.59,63.14 ; v2(71.59,62.45) 70.89,62.45 ; v2(43.26,95.24) 43.96,95.24 ; v2(43.26,95.24) 43.26,94.55 ; v2(43.26,95.24) 43.26,95.94 ; v2(43.26,95.24) 42.57,95.24 ; v2(65.26,67.24) 65.96,67.24 ; v2(65.26,67.24) 64.57,67.24 ; v2(65.26,67.24) 65.26,66.55 ; v2(65.26,67.24) 65.26,67.94 ; J9.8 21.26,73.4 ; J9.8 19.81,74.86 ; J9.8 21.26,74.86 ; J9.8 19.81,73.4 ; 56.89,29.14 J14.12 ; J14.12 56.89,27.68 ; J14.12 58.35,27.68 ; J14.12 58.35,29.14 ; v2(9.26,37.24) 9.96,37.24 ; v2(9.26,37.24) 9.26,36.55 ; v2(9.26,37.24) 8.57,37.24 ; v2(9.26,37.24) 9.26,37.94 ; v2(95.26,77.24) 95.26,77.94 ; v2(95.26,77.24) 95.96,77.24 ; v2(95.26,77.24) 94.57,77.24 ; v2(95.26,77.24) 95.26,76.55 ; v2(87.26,87.24) 87.26,87.94 ; v2(87.26,87.24) 87.26,86.55 ; v2(87.26,87.24) 86.57,87.24 ; v2(87.26,87.24) 87.96,87.24 ; v2(33.26,69.24) 33.26,69.94 ; v2(33.26,69.24) 33.26,68.55 ; v2(33.26,69.24) 32.57,69.24 ; v2(33.26,69.24) 33.96,69.24 ; v2(39.26,87.24) 39.26,87.94 ; v2(39.26,87.24) 39.96,87.24 ; v2(39.26,87.24) 38.57,87.24 ; v2(39.26,87.24) 39.26,86.55 ; 7.26,32.55 v2(7.26,33.24) ; v2(7.26,33.24) 6.57,33.24 ; v2(7.26,33.24) 7.26,33.94 ; v2(7.26,33.24) 7.96,33.24 ; v2(83.26,83.24) 83.96,83.24 ; v2(83.26,83.24) 83.26,83.94 ; v2(83.26,83.24) 82.57,83.24 ; v2(83.26,83.24) 83.26,82.55 ; v2(15.26,41.24) 15.96,41.24 ; v2(15.26,41.24) 15.26,40.55 ; v2(15.26,41.24) 15.26,41.94 ; v2(15.26,41.24) 14.57,41.24 ; 3.26,82.55 v2(3.26,83.24) ; v2(3.26,83.24) 2.57,83.24 ; v2(3.26,83.24) 3.26,83.94 ; v2(3.26,83.24) 3.96,83.24 ; 54.57,79.24 v2(55.26,79.24) ; v2(55.26,79.24) 55.26,79.94 ; v2(55.26,79.24) 55.96,79.24 ; v2(55.26,79.24) 55.26,78.55 ; 55.26,80.55 v2(55.26,81.24) ; v2(55.26,81.24) 55.96,81.24 ; v2(55.26,81.24) 55.26,81.94 ; v2(55.26,81.24) 54.57,81.24 ; v2(91.26,37.24) 91.96,37.24 ; v2(91.26,37.24) 91.26,37.94 ; v2(91.26,37.24) 91.26,36.55 ; v2(91.26,37.24) 90.57,37.24 ; 43.26,82.55 v2(43.26,83.24) ; v2(43.26,83.24) 43.26,83.94 ; v2(43.26,83.24) 43.96,83.24 ; v2(43.26,83.24) 42.57,83.24 ; v2(15.26,11.24) 15.96,11.24 ; v2(15.26,11.24) 14.57,11.24 ; v2(15.26,11.24) 15.26,10.55 ; v2(15.26,11.24) 15.26,11.94 ; v2(3.26,27.24) 3.96,27.24 ; v2(3.26,27.24) 3.26,26.55 ; v2(3.26,27.24) 3.26,27.94 ; v2(3.26,27.24) 2.57,27.24 ; v2(9.26,69.24) 9.26,69.94 ; v2(9.26,69.24) 9.26,68.55 ; v2(9.26,69.24) 9.96,69.24 ; v2(9.26,69.24) 8.57,69.24 ; v2(41.26,17.24) 41.26,17.94 ; v2(41.26,17.24) 40.57,17.24 ; v2(41.26,17.24) 41.96,17.24 ; v2(41.26,17.24) 41.26,16.55 ; 57.26,92.55 v2(57.26,93.24) ; v2(57.26,93.24) 57.26,93.94 ; v2(57.26,93.24) 57.96,93.24 ; v2(57.26,93.24) 56.57,93.24 ; v2(85.26,57.24) 85.96,57.24 ; v2(85.26,57.24) 85.26,56.55 ; v2(85.26,57.24) 84.57,57.24 ; v2(85.26,57.24) 85.26,57.94 ; 64.57,81.24 v2(65.26,81.24) ; v2(65.26,81.24) 65.26,81.94 ; v2(65.26,81.24) 65.96,81.24 ; v2(65.26,81.24) 65.26,80.55 ; 82.57,55.24 v2(83.26,55.24) ; v2(83.26,55.24) 83.26,54.55 ; v2(83.26,55.24) 83.26,55.94 ; v2(83.26,55.24) 83.96,55.24 ; 38.57,15.24 v2(39.26,15.24) ; v2(39.26,15.24) 39.26,14.55 ; v2(39.26,15.24) 39.96,15.24 ; v2(39.26,15.24) 39.26,15.94 ; 3.26,20.55 v2(3.26,21.24) ; v2(3.26,21.24) 3.96,21.24 ; v2(3.26,21.24) 3.26,21.94 ; v2(3.26,21.24) 2.57,21.24 ; v2(39.26,89.24) 39.96,89.24 ; v2(39.26,89.24) 38.57,89.24 ; v2(39.26,89.24) 39.26,89.94 ; v2(39.26,89.24) 39.26,88.55 ; v2(63.26,87.24) 63.26,87.94 ; v2(63.26,87.24) 62.57,87.24 ; v2(63.26,87.24) 63.96,87.24 ; 68.57,89.24 v2(69.26,89.24) ; v2(69.26,89.24) 69.26,88.55 ; v2(69.26,89.24) 69.96,89.24 ; v2(69.26,89.24) 69.26,89.94 ; v2(15.26,35.24) 15.26,35.94 ; v2(15.26,35.24) 15.96,35.24 ; v2(15.26,35.24) 14.57,35.24 ; v2(15.26,35.24) 15.26,34.55 ; v2(11.26,87.24) 11.26,87.94 ; v2(11.26,87.24) 11.96,87.24 ; v2(11.26,87.24) 10.57,87.24 ; v2(11.26,87.24) 11.26,86.55 ; 66.57,87.24 v2(67.26,87.24) ; v2(67.26,87.24) 67.26,87.94 ; v2(67.26,87.24) 67.96,87.24 ; 72.13,70.86 J10.27 ; J10.27 72.13,72.32 ; J10.27 73.59,70.86 ; J10.27 73.59,72.32 ; J19.3 97.72,5.01 ; J19.3 97.72,3.55 ; J19.3 96.26,5.01 ; J19.3 96.26,3.55 ; 4.57,85.24 v2(5.26,85.24) ; v2(5.26,85.24) 5.26,85.94 ; v2(5.26,85.24) 5.26,84.55 ; 18.57,43.24 v2(19.26,43.24) ; v2(19.26,43.24) 19.96,43.24 ; v2(19.26,43.24) 19.26,42.55 ; v2(19.26,43.24) 19.26,43.94 ; 45.26,80.55 v2(45.26,81.24) ; v2(45.26,81.24) 45.26,81.94 ; v2(45.26,81.24) 44.57,81.24 ; v2(45.26,81.24) 45.96,81.24 ; 11.26,80.55 v2(11.26,81.24) ; v2(11.26,81.24) 11.26,81.94 ; v2(11.26,81.24) 10.57,81.24 ; v2(11.26,81.24) 11.96,81.24 ; 91.26,76.55 v2(91.26,77.24) ; v2(91.26,77.24) 91.96,77.24 ; v2(91.26,77.24) 90.57,77.24 ; v2(91.26,77.24) 91.26,77.94 ; v2(43.26,15.24) 43.96,15.24 ; v2(43.26,15.24) 43.26,14.55 ; v2(43.26,15.24) 43.26,15.94 ; v2(43.26,15.24) 42.57,15.24 ; 47.26,2.55 v2(47.26,3.24) ; v2(47.26,3.24) 46.57,3.24 ; v2(47.26,3.24) 47.96,3.24 ; v2(47.26,3.24) 47.26,3.94 ; v2(61.26,89.24) 61.26,89.94 ; v2(61.26,89.24) 60.57,89.24 ; v2(61.26,89.24) 61.26,88.55 ; v2(61.26,89.24) 61.96,89.24 ; v2(11.26,89.24) 11.26,89.94 ; v2(11.26,89.24) 11.26,88.55 ; v2(11.26,89.24) 10.57,89.24 ; v2(11.26,89.24) 11.96,89.24 ; v2(11.26,15.24) 11.26,15.94 ; v2(11.26,15.24) 10.57,15.24 ; v2(11.26,15.24) 11.26,14.55 ; v2(11.26,15.24) 11.96,15.24 ; v2(3.26,41.24) 3.96,41.24 ; v2(3.26,41.24) 2.57,41.24 ; v2(3.26,41.24) 3.26,40.55 ; v2(3.26,41.24) 3.26,41.94 ; 11.26,8.55 v2(11.26,9.24) ; v2(11.26,9.24) 11.96,9.24 ; v2(11.26,9.24) 11.26,9.94 ; v2(11.26,9.24) 10.57,9.24 ; J8.10 36.76,87.37 ; J8.10 35.3,88.83 ; J8.10 35.3,87.37 ; J8.10 36.76,88.83 ; 15.26,38.55 v2(15.26,39.24) ; v2(15.26,39.24) 15.26,39.94 ; v2(15.26,39.24) 14.57,39.24 ; v2(15.26,39.24) 15.96,39.24 ; v2(5.26,29.24) 5.26,29.94 ; v2(5.26,29.24) 4.57,29.24 ; v2(5.26,29.24) 5.26,28.55 ; v2(5.26,29.24) 5.96,29.24 ; 56.57,95.24 v2(57.26,95.24) ; v2(57.26,95.24) 57.96,95.24 ; v2(57.26,95.24) 57.26,94.55 ; v2(57.26,95.24) 57.26,95.94 ; 7.26,36.55 v2(7.26,37.24) ; v2(7.26,37.24) 7.26,37.94 ; v2(7.26,37.24) 6.57,37.24 ; v2(7.26,37.24) 7.96,37.24 ; 2.57,39.24 v2(3.26,39.24) ; v2(3.26,39.24) 3.26,39.94 ; v2(3.26,39.24) 3.26,38.55 ; v2(3.26,39.24) 3.96,39.24 ; v2(19.26,45.24) 19.96,45.24 ; v2(19.26,45.24) 19.26,45.94 ; v2(19.26,45.24) 19.26,44.55 ; v2(19.26,45.24) 18.57,45.24 ; v2(91.26,25.24) 91.96,25.24 ; v2(91.26,25.24) 91.26,24.55 ; v2(91.26,25.24) 91.26,25.94 ; v2(91.26,25.24) 90.57,25.24 ; v2(93.26,17.24) 93.96,17.24 ; v2(93.26,17.24) 93.26,16.55 ; v2(93.26,17.24) 92.57,17.24 ; v2(93.26,17.24) 93.26,17.94 ; v2(43.26,81.24) 43.26,81.94 ; v2(43.26,81.24) 43.96,81.24 ; v2(43.26,81.24) 42.57,81.24 ; 2.57,71.24 v2(3.26,71.24) ; v2(3.26,71.24) 3.26,71.94 ; v2(3.26,71.24) 3.26,70.55 ; v2(3.26,71.24) 3.96,71.24 ; v2(9.26,77.24) 9.26,77.94 ; v2(9.26,77.24) 9.26,76.55 ; v2(9.26,77.24) 8.57,77.24 ; v2(9.26,77.24) 9.96,77.24 ; v2(89.26,17.24) 89.26,17.94 ; v2(89.26,17.24) 89.26,16.55 ; v2(89.26,17.24) 88.57,17.24 ; v2(89.26,17.24) 89.96,17.24 ; 81.26,78.55 v2(81.26,79.24) ; v2(81.26,79.24) 81.26,79.94 ; v2(81.26,79.24) 80.57,79.24 ; v2(81.26,79.24) 81.96,79.24 ; 89.26,56.55 v2(89.26,57.24) ; v2(89.26,57.24) 89.96,57.24 ; v2(89.26,57.24) 88.57,57.24 ; v2(89.26,57.24) 89.26,57.94 ; v2(74.64,59.4) 75.34,59.4 ; v2(74.64,59.4) 74.64,60.1 ; v2(74.64,59.4) 74.64,58.7 ; v2(74.64,59.4) 73.94,59.4 ; v2(7.26,31.24) 7.96,31.24 ; v2(7.26,31.24) 6.57,31.24 ; v2(7.26,31.24) 7.26,31.94 ; v2(7.26,31.24) 7.26,30.55 ; v2(45.26,93.24) 45.26,93.94 ; v2(45.26,93.24) 45.26,92.55 ; v2(45.26,93.24) 44.57,93.24 ; v2(45.26,93.24) 45.96,93.24 ; v2(45.26,15.24) 45.26,15.94 ; v2(45.26,15.24) 45.96,15.24 ; v2(45.26,15.24) 45.26,14.55 ; v2(45.26,15.24) 44.57,15.24 ; 46.57,5.24 v2(47.26,5.24) ; v2(47.26,5.24) 47.26,4.55 ; v2(47.26,5.24) 47.26,5.94 ; v2(47.26,5.24) 47.96,5.24 ; v2(83.26,57.24) 83.26,57.94 ; v2(83.26,57.24) 83.26,56.55 ; v2(83.26,57.24) 82.57,57.24 ; v2(83.26,57.24) 83.96,57.24 ; 95.26,78.55 v2(95.26,79.24) ; v2(95.26,79.24) 95.96,79.24 ; v2(95.26,79.24) 94.57,79.24 ; v2(95.26,79.24) 95.26,79.94 ; v2(15.26,37.24) 15.26,37.94 ; v2(15.26,37.24) 15.96,37.24 ; v2(15.26,37.24) 15.26,36.55 ; v2(15.26,37.24) 14.57,37.24 ; 9.26,34.55 v2(9.26,35.24) ; v2(9.26,35.24) 9.26,35.94 ; v2(9.26,35.24) 9.96,35.24 ; v2(9.26,35.24) 8.57,35.24 ; 60.57,87.24 v2(61.26,87.24) ; v2(61.26,87.24) 61.96,87.24 ; v2(61.26,87.24) 61.26,87.94 ; 4.57,77.24 v2(5.26,77.24) ; v2(5.26,77.24) 5.26,76.55 ; v2(5.26,77.24) 5.26,77.94 ; v2(45.26,95.24) 45.96,95.24 ; v2(45.26,95.24) 45.26,95.94 ; v2(45.26,95.24) 45.26,94.55 ; v2(45.26,95.24) 44.57,95.24 ; 5.26,38.55 v2(5.26,39.24) ; v2(5.26,39.24) 4.57,39.24 ; v2(5.26,39.24) 5.96,39.24 ; v2(5.26,39.24) 5.26,39.94 ; 2.57,25.24 v2(3.26,25.24) ; v2(3.26,25.24) 3.26,24.55 ; v2(3.26,25.24) 3.26,25.94 ; v2(3.26,25.24) 3.96,25.24 ; 4.57,83.24 v2(5.26,83.24) ; v2(5.26,83.24) 5.26,82.55 ; v2(5.26,83.24) 5.26,83.94 ; v2(5.26,27.24) 5.26,27.94 ; v2(5.26,27.24) 5.26,26.55 ; v2(5.26,27.24) 4.57,27.24 ; v2(5.26,27.24) 5.96,27.24 ; v2(9.26,81.24) 9.26,81.94 ; v2(9.26,81.24) 9.96,81.24 ; v2(9.26,81.24) 9.26,80.55 ; v2(9.26,81.24) 8.57,81.24 ; J7.3 97.72,92.64 ; J7.3 96.26,91.18 ; J7.3 97.72,91.18 ; J7.3 96.26,92.64 ; 83.26,80.55 v2(83.26,81.24) ; v2(83.26,81.24) 83.96,81.24 ; v2(83.26,81.24) 82.57,81.24 ; v2(83.26,81.24) 83.26,81.94 ; v2(81.26,95.24) 81.96,95.24 ; v2(81.26,95.24) 80.57,95.24 ; v2(81.26,95.24) 81.26,95.94 ; v2(81.26,95.24) 81.26,94.55 ; 52.57,93.24 v2(53.26,93.24) ; v2(53.26,93.24) 53.96,93.24 ; v2(53.26,93.24) 53.26,92.55 ; v2(53.26,93.24) 53.26,93.94 ; v2(7.26,35.24) 7.96,35.24 ; v2(7.26,35.24) 6.57,35.24 ; v2(7.26,35.24) 7.26,34.55 ; v2(7.26,35.24) 7.26,35.94 ; 48.57,93.24 v2(49.26,93.24) ; v2(49.26,93.24) 49.26,92.55 ; v2(49.26,93.24) 49.26,93.94 ; v2(49.26,93.24) 49.96,93.24 ; 95.02,64.73 v2(95.72,64.73) ; v2(95.72,64.73) 95.72,65.43 ; v2(95.72,64.73) 95.72,64.03 ; v2(13.26,43.24) 13.26,43.94 ; v2(13.26,43.24) 13.96,43.24 ; v2(13.26,43.24) 12.57,43.24 ; v2(13.26,43.24) 13.26,42.55 ; v2(7.26,23.24) 7.26,23.94 ; v2(7.26,23.24) 6.57,23.24 ; v2(7.26,23.24) 7.96,23.24 ; v2(7.26,23.24) 7.26,22.55 ; 66.57,89.24 v2(67.26,89.24) ; v2(67.26,89.24) 67.96,89.24 ; v2(67.26,89.24) 67.26,89.94 ; v2(67.26,89.24) 67.26,88.55 ; 21.26,38.55 v2(21.26,39.24) ; v2(21.26,39.24) 21.96,39.24 ; v2(21.26,39.24) 21.26,39.94 ; v2(21.26,39.24) 20.57,39.24 ; v2(9.26,75.24) 9.26,75.94 ; v2(9.26,75.24) 9.26,74.55 ; v2(9.26,75.24) 9.96,75.24 ; v2(9.26,75.24) 8.57,75.24 ; 13.26,8.55 v2(13.26,9.24) ; v2(13.26,9.24) 12.57,9.24 ; v2(13.26,9.24) 13.26,9.94 ; v2(13.26,9.24) 13.96,9.24 ; v2(57.26,79.24) 57.96,79.24 ; v2(57.26,79.24) 56.57,79.24 ; v2(57.26,79.24) 57.26,78.55 ; v2(57.26,79.24) 57.26,79.94 ; v2(83.26,35.24) 83.26,35.94 ; v2(83.26,35.24) 83.96,35.24 ; v2(83.26,35.24) 83.26,34.55 ; v2(83.26,35.24) 82.57,35.24 ; 91.26,26.55 v2(91.26,27.24) ; v2(91.26,27.24) 91.26,27.94 ; v2(91.26,27.24) 91.96,27.24 ; v2(91.26,27.24) 90.57,27.24 ; 18.57,39.24 v2(19.26,39.24) ; v2(19.26,39.24) 19.26,38.55 ; v2(19.26,39.24) 19.96,39.24 ; v2(19.26,39.24) 19.26,39.94 ; 82.57,77.24 v2(83.26,77.24) ; v2(83.26,77.24) 83.26,77.94 ; v2(83.26,77.24) 83.26,76.55 ; v2(83.26,77.24) 83.96,77.24 ; v2(15.26,9.24) 15.96,9.24 ; v2(15.26,9.24) 15.26,8.55 ; v2(15.26,9.24) 15.26,9.94 ; v2(15.26,9.24) 14.57,9.24 ; 81.26,34.55 v2(81.26,35.24) ; v2(81.26,35.24) 81.96,35.24 ; v2(81.26,35.24) 81.26,35.94 ; v2(81.26,35.24) 80.57,35.24 ; 58.57,81.24 v2(59.26,81.24) ; v2(59.26,81.24) 59.26,81.94 ; v2(59.26,81.24) 59.96,81.24 ; v2(59.26,81.24) 59.26,80.55 ; v2(13.26,39.24) 13.96,39.24 ; v2(13.26,39.24) 12.57,39.24 ; v2(13.26,39.24) 13.26,38.55 ; v2(13.26,39.24) 13.26,39.94 ; 47.26,62.55 v2(47.26,63.24) ; v2(47.26,63.24) 46.57,63.24 ; v2(47.26,63.24) 47.96,63.24 ; v2(47.26,63.24) 47.26,63.94 ; 6.57,21.24 v2(7.26,21.24) 7.26,21.94 ; v2(43.26,93.24) 43.96,93.24 ; v2(43.26,93.24) 43.26,93.94 ; v2(43.26,93.24) 42.57,93.24 ; v2(43.26,93.24) 43.26,92.55 ; v2(63.26,89.24) 63.26,89.94 ; v2(63.26,89.24) 62.57,89.24 ; v2(63.26,89.24) 63.96,89.24 ; v2(63.26,89.24) 63.26,88.55 ; 12.57,35.24 v2(13.26,35.24) ; v2(13.26,35.24) 13.96,35.24 ; v2(13.26,35.24) 13.26,34.55 ; v2(13.26,35.24) 13.26,35.94 ; v2(13.26,3.24) 13.96,3.24 ; v2(13.26,3.24) 13.26,3.94 ; v2(13.26,3.24) 12.57,3.24 ; v2(13.26,3.24) 13.26,2.55 ; v2(7.26,39.24) 7.96,39.24 ; v2(7.26,39.24) 7.26,39.94 ; v2(7.26,39.24) 6.57,39.24 ; v2(7.26,39.24) 7.26,38.55 ; v2(59.26,77.24) 59.96,77.24 ; v2(59.26,77.24) 58.57,77.24 ; v2(59.26,77.24) 59.26,76.55 ; v2(59.26,77.24) 59.26,77.94 ; 13.26,36.55 v2(13.26,37.24) ; v2(13.26,37.24) 13.96,37.24 ; v2(13.26,37.24) 13.26,37.94 ; v2(13.26,37.24) 12.57,37.24 ; v2(3.26,75.24) 3.96,75.24 ; v2(3.26,75.24) 3.26,75.94 ; v2(3.26,75.24) 3.26,74.55 ; v2(3.26,75.24) 2.57,75.24 ; 73.26,76.55 v2(73.26,77.24) ; v2(73.26,77.24) 73.26,77.94 ; v2(73.26,77.24) 72.57,77.24 ; v2(73.26,77.24) 73.96,77.24 ; v2(7.26,69.24) 7.26,69.94 ; v2(7.26,69.24) 7.26,68.55 ; v2(7.26,69.24) 7.96,69.24 ; v2(7.26,69.24) 6.57,69.24 ; J14.23 73.59,25.14 ; J14.23 72.13,25.14 ; J14.23 73.59,26.6 ; J14.23 72.13,26.6 ; v2(53.26,5.24) 53.96,5.24 ; v2(53.26,5.24) 52.57,5.24 ; v2(53.26,5.24) 53.26,4.55 ; v2(53.26,5.24) 53.26,5.94 ; 16.57,37.24 v2(17.26,37.24) ; v2(17.26,37.24) 17.96,37.24 ; v2(17.26,37.24) 17.26,36.55 ; v2(17.26,37.24) 17.26,37.94 ; 13.26,12.55 v2(13.26,13.24) ; v2(13.26,13.24) 13.26,13.94 ; v2(13.26,13.24) 12.57,13.24 ; v2(13.26,13.24) 13.96,13.24 ; 40.57,13.24 v2(41.26,13.24) ; v2(41.26,13.24) 41.26,12.55 ; v2(41.26,13.24) 41.96,13.24 ; v2(41.26,13.24) 41.26,13.94 ; 26.57,69.24 v2(27.26,69.24) ; v2(27.26,69.24) 27.96,69.24 ; v2(27.26,69.24) 27.26,68.55 ; v2(27.26,69.24) 27.26,69.94 ; v2(51.26,95.24) 51.96,95.24 ; v2(51.26,95.24) 50.57,95.24 ; v2(51.26,95.24) 51.26,95.94 ; v2(51.26,95.24) 51.26,94.55 ; 73.11,60.22 v2(73.11,60.92) ; v2(73.11,60.92) 72.42,60.92 ; v2(73.11,60.92) 73.11,61.62 ; v2(73.11,60.92) 73.81,60.92 ; 2.57,37.24 v2(3.26,37.24) ; v2(3.26,37.24) 3.26,37.94 ; v2(3.26,37.24) 3.96,37.24 ; v2(3.26,37.24) 3.26,36.55 ; J2.3 18.98,96.45 ; J2.3 17.52,94.99 ; J2.3 17.52,96.45 ; J2.3 18.98,94.99 ; v2(3.26,31.24) 3.96,31.24 ; v2(3.26,31.24) 2.57,31.24 ; v2(3.26,31.24) 3.26,31.94 ; v2(3.26,31.24) 3.26,30.55 ; 61.26,80.55 v2(61.26,81.24) ; v2(61.26,81.24) 60.57,81.24 ; v2(61.26,81.24) 61.26,81.94 ; v2(61.26,81.24) 61.96,81.24 ; v2(91.26,35.24) 91.26,35.94 ; v2(91.26,35.24) 91.96,35.24 ; v2(91.26,35.24) 91.26,34.55 ; v2(91.26,35.24) 90.57,35.24 ; v2(41.26,15.24) 41.96,15.24 ; v2(41.26,15.24) 41.26,15.94 ; v2(41.26,15.24) 41.26,14.55 ; v2(41.26,15.24) 40.57,15.24 ; 5.26,30.55 v2(5.26,31.24) ; v2(5.26,31.24) 5.96,31.24 ; v2(5.26,31.24) 5.26,31.94 ; v2(5.26,31.24) 4.57,31.24 ; J10.22 65.97,73.4 ; J10.22 65.97,74.86 ; J10.22 64.51,73.4 ; J10.22 64.51,74.86 ; 44.57,65.24 v2(45.26,65.24) ; v2(45.26,65.24) 45.96,65.24 ; v2(45.26,65.24) 45.26,64.55 ; v2(45.26,65.24) 45.26,65.94 ; 21.26,42.55 v2(21.26,43.24) ; v2(21.26,43.24) 20.57,43.24 ; v2(21.26,43.24) 21.96,43.24 ; v2(21.26,43.24) 21.26,43.94 ; v2(79.26,95.24) 79.26,95.94 ; v2(79.26,95.24) 78.57,95.24 ; v2(79.26,95.24) 79.26,94.55 ; v2(79.26,95.24) 79.96,95.24 ; v2(93.26,25.24) 93.96,25.24 ; v2(93.26,25.24) 93.26,25.94 ; v2(93.26,25.24) 93.26,24.55 ; v2(93.26,25.24) 92.57,25.24 ; 35.26,76.55 v2(35.26,77.24) ; v2(35.26,77.24) 35.96,77.24 ; v2(35.26,77.24) 35.26,77.94 ; v2(35.26,77.24) 34.57,77.24 ; 52.57,3.24 v2(53.26,3.24) ; v2(53.26,3.24) 53.96,3.24 ; v2(53.26,3.24) 53.26,3.94 ; v2(53.26,3.24) 53.26,2.55 ; v2(7.26,27.24) 7.26,27.94 ; v2(7.26,27.24) 7.96,27.24 ; v2(7.26,27.24) 7.26,26.55 ; v2(7.26,27.24) 6.57,27.24 ; 63.26,80.55 v2(63.26,81.24) ; v2(63.26,81.24) 63.26,81.94 ; v2(63.26,81.24) 63.96,81.24 ; v2(63.26,81.24) 62.57,81.24 ; v2(77.26,95.24) 77.96,95.24 ; v2(77.26,95.24) 77.26,95.94 ; v2(77.26,95.24) 76.57,95.24 ; v2(77.26,95.24) 77.26,94.55 ; 70.57,79.24 v2(71.26,79.24) ; v2(71.26,79.24) 71.26,79.94 ; v2(71.26,79.24) 71.26,78.55 ; v2(71.26,79.24) 71.96,79.24 ; v2(69.26,95.24) 69.96,95.24 ; v2(69.26,95.24) 69.26,94.55 ; v2(69.26,95.24) 69.26,95.94 ; v2(69.26,95.24) 68.57,95.24 ; 3.26,17.94 v2(3.26,17.24) 2.57,17.24 ; 10.57,3.24 v2(11.26,3.24) ; v2(11.26,3.24) 11.96,3.24 ; v2(11.26,3.24) 11.26,3.94 ; v2(11.26,3.24) 11.26,2.55 ; v2(51.26,3.24) 51.96,3.24 ; v2(51.26,3.24) 50.57,3.24 ; v2(51.26,3.24) 51.26,3.94 ; v2(51.26,3.24) 51.26,2.55 ; v2(3.26,29.24) 3.26,29.94 ; v2(3.26,29.24) 3.26,28.55 ; v2(3.26,29.24) 2.57,29.24 ; v2(3.26,29.24) 3.96,29.24 ; v2(5.26,75.24) 5.26,75.94 ; v2(5.26,75.24) 5.26,74.55 ; v2(5.26,75.24) 4.57,75.24 ; 79.26,56.55 v2(79.26,57.24) ; v2(79.26,57.24) 79.26,57.94 ; v2(79.26,57.24) 78.57,57.24 ; v2(79.26,57.24) 79.96,57.24 ; 57.26,76.55 v2(57.26,77.24) ; v2(57.26,77.24) 57.26,77.94 ; v2(57.26,77.24) 57.96,77.24 ; v2(57.26,77.24) 56.57,77.24 ; 4.57,19.24 v2(5.26,19.24) 5.26,19.94 ; 11.26,36.55 v2(11.26,37.24) ; v2(11.26,37.24) 11.26,37.94 ; v2(11.26,37.24) 10.57,37.24 ; v2(11.26,37.24) 11.96,37.24 ; v2(33.26,77.24) 33.26,77.94 ; v2(33.26,77.24) 33.26,76.55 ; v2(33.26,77.24) 32.57,77.24 ; v2(33.26,77.24) 33.96,77.24 ; 12.57,17.24 v2(13.26,17.24) ; v2(13.26,17.24) 13.96,17.24 ; v2(13.26,17.24) 13.26,16.55 ; v2(13.26,17.24) 13.26,17.94 ; 2.57,69.24 v2(3.26,69.24) ; v2(3.26,69.24) 3.26,69.94 ; v2(3.26,69.24) 3.26,68.55 ; v2(3.26,69.24) 3.96,69.24 ; 7.36,3.55 J18.3 ; J18.3 8.82,5.01 ; J18.3 8.82,3.55 ; J18.3 7.36,5.01 ; 8.57,39.24 v2(9.26,39.24) ; v2(9.26,39.24) 9.26,38.55 ; v2(9.26,39.24) 9.96,39.24 ; v2(9.26,39.24) 9.26,39.94 ; 7.36,94.99 J1.3 ; J1.3 7.36,96.45 ; J1.3 8.82,96.45 ; J1.3 8.82,94.99 ; 4.57,35.24 v2(5.26,35.24) ; v2(5.26,35.24) 5.26,34.55 ; v2(5.26,35.24) 5.26,35.94 ; v2(5.26,35.24) 5.96,35.24 ; v2(87.26,17.24) 87.26,17.94 ; v2(87.26,17.24) 87.26,16.55 ; v2(87.26,17.24) 86.57,17.24 ; v2(87.26,17.24) 87.96,17.24 ; 65.26,88.55 v2(65.26,89.24) ; v2(65.26,89.24) 65.26,89.94 ; v2(65.26,89.24) 65.96,89.24 ; v2(65.26,89.24) 64.57,89.24 ; 48.57,3.24 v2(49.26,3.24) ; v2(49.26,3.24) 49.26,3.94 ; v2(49.26,3.24) 49.96,3.24 ; v2(49.26,3.24) 49.26,2.55 ; v2(71.26,77.24) 71.96,77.24 ; v2(71.26,77.24) 71.26,77.94 ; v2(71.26,77.24) 71.26,76.55 ; v2(71.26,77.24) 70.57,77.24 ; v2(49.26,95.24) 49.96,95.24 ; v2(49.26,95.24) 48.57,95.24 ; v2(49.26,95.24) 49.26,95.94 ; v2(49.26,95.24) 49.26,94.55 ; 91.26,28.55 v2(91.26,29.24) ; v2(91.26,29.24) 91.96,29.24 ; v2(91.26,29.24) 90.57,29.24 ; v2(91.26,29.24) 91.26,29.94 ; 19.26,40.55 v2(19.26,41.24) ; v2(19.26,41.24) 19.96,41.24 ; v2(19.26,41.24) 19.26,41.94 ; v2(19.26,41.24) 18.57,41.24 ; 4.57,23.24 v2(5.26,23.24) ; v2(5.26,23.24) 5.26,23.94 ; v2(5.26,23.24) 5.26,22.55 ; v2(5.26,23.24) 5.96,23.24 ; 28.57,91.24 v2(29.26,91.24) ; v2(29.26,91.24) 29.96,91.24 ; v2(29.26,91.24) 29.26,91.94 ; v2(29.26,91.24) 29.26,90.55 ; v2(17.26,45.24) 17.96,45.24 ; v2(17.26,45.24) 17.26,45.94 ; v2(17.26,45.24) 17.26,44.55 ; v2(17.26,45.24) 16.57,45.24 ; v2(9.26,41.24) 9.96,41.24 ; v2(9.26,41.24) 9.26,40.55 ; v2(9.26,41.24) 8.57,41.24 ; v2(9.26,41.24) 9.26,41.94 ; 50.57,5.24 v2(51.26,5.24) ; v2(51.26,5.24) 51.26,4.55 ; v2(51.26,5.24) 51.96,5.24 ; v2(51.26,5.24) 51.26,5.94 ; 11.26,84.55 v2(11.26,85.24) ; v2(11.26,85.24) 11.26,85.94 ; v2(11.26,85.24) 11.96,85.24 ; v2(11.26,85.24) 10.57,85.24 ; v2(5.26,21.24) 5.26,21.94 ; v2(5.26,21.24) 5.96,21.24 ; v2(5.26,21.24) 4.57,21.24 ; v2(5.26,21.24) 5.26,20.55 ; v2(67.26,95.24) 67.96,95.24 ; v2(67.26,95.24) 66.57,95.24 ; v2(67.26,95.24) 67.26,94.55 ; v2(67.26,95.24) 67.26,95.94 ; 14.57,13.24 v2(15.26,13.24) ; v2(15.26,13.24) 15.96,13.24 ; v2(15.26,13.24) 15.26,13.94 ; v2(15.26,13.24) 15.26,12.55 ; v2(7.26,25.24) 7.96,25.24 ; v2(7.26,25.24) 7.26,24.55 ; v2(7.26,25.24) 6.57,25.24 ; v2(7.26,25.24) 7.26,25.94 ; v2(45.26,13.24) 45.26,13.94 ; v2(45.26,13.24) 45.26,12.55 ; v2(45.26,13.24) 44.57,13.24 ; v2(45.26,13.24) 45.96,13.24 ; v2(13.26,15.24) 13.96,15.24 ; v2(13.26,15.24) 12.57,15.24 ; v2(13.26,15.24) 13.26,15.94 ; v2(13.26,15.24) 13.26,14.55 ; 16.57,39.24 v2(17.26,39.24) ; v2(17.26,39.24) 17.26,39.94 ; v2(17.26,39.24) 17.96,39.24 ; v2(17.26,39.24) 17.26,38.55 ; 2.57,85.24 v2(3.26,85.24) ; v2(3.26,85.24) 3.96,85.24 ; v2(3.26,85.24) 3.26,84.55 ; v2(3.26,85.24) 3.26,85.94 ; 47.26,94.55 v2(47.26,95.24) ; v2(47.26,95.24) 47.96,95.24 ; v2(47.26,95.24) 46.57,95.24 ; v2(47.26,95.24) 47.26,95.94 ; 59.43,72.32 J10.17 ; J10.17 59.43,70.86 ; J10.17 60.89,70.86 ; J10.17 60.89,72.32 ; 85.26,76.55 v2(85.26,77.24) ; v2(85.26,77.24) 84.57,77.24 ; v2(85.26,77.24) 85.26,77.94 ; v2(85.26,77.24) 85.96,77.24 ; v2(21.26,41.24) 21.96,41.24 ; v2(21.26,41.24) 20.57,41.24 ; v2(21.26,41.24) 21.26,41.94 ; v2(21.26,41.24) 21.26,40.55 ; 55.26,92.55 v2(55.26,93.24) ; v2(55.26,93.24) 55.96,93.24 ; v2(55.26,93.24) 55.26,93.94 ; v2(55.26,93.24) 54.57,93.24 ; v2(7.26,41.24) 7.96,41.24 ; v2(7.26,41.24) 7.26,41.94 ; v2(7.26,41.24) 6.57,41.24 ; v2(7.26,41.24) 7.26,40.55 ; v2(47.26,93.24) 47.96,93.24 ; v2(47.26,93.24) 47.26,92.55 ; v2(47.26,93.24) 47.26,93.94 ; v2(47.26,93.24) 46.57,93.24 ; 71.26,88.55 v2(71.26,89.24) ; v2(71.26,89.24) 71.26,89.94 ; v2(71.26,89.24) 70.57,89.24 ; v2(71.26,89.24) 71.96,89.24 ; 84.57,83.24 v2(85.26,83.24) ; v2(85.26,83.24) 85.26,83.94 ; v2(85.26,83.24) 85.96,83.24 ; v2(85.26,83.24) 85.26,82.55 ; 2.57,79.24 v2(3.26,79.24) ; v2(3.26,79.24) 3.96,79.24 ; v2(3.26,79.24) 3.26,78.55 ; v2(3.26,79.24) 3.26,79.94 ; 5.26,80.55 v2(5.26,81.24) ; v2(5.26,81.24) 5.26,81.94 ; v2(5.26,81.24) 4.57,81.24 ; 51.26,92.55 v2(51.26,93.24) ; v2(51.26,93.24) 51.96,93.24 ; v2(51.26,93.24) 51.26,93.94 ; v2(51.26,93.24) 50.57,93.24 ; 19.26,34.55 v2(19.26,35.24) ; v2(19.26,35.24) 19.26,35.94 ; v2(19.26,35.24) 19.96,35.24 ; v2(19.26,35.24) 18.57,35.24 ; 4.57,33.24 v2(5.26,33.24) ; v2(5.26,33.24) 5.26,32.55 ; v2(5.26,33.24) 5.26,33.94 ; v2(5.26,33.24) 5.96,33.24 ; 89.26,38.55 v2(89.26,39.24) ; v2(89.26,39.24) 88.57,39.24 ; v2(89.26,39.24) 89.96,39.24 ; v2(89.26,39.24) 89.26,39.94 ; 83.26,78.55 v2(83.26,79.24) ; v2(83.26,79.24) 83.26,79.94 ; v2(83.26,79.24) 82.57,79.24 ; v2(83.26,79.24) 83.96,79.24 ; 15.26,44.55 v2(15.26,45.24) ; v2(15.26,45.24) 15.26,45.94 ; v2(15.26,45.24) 15.96,45.24 ; v2(15.26,45.24) 14.57,45.24 ; 85.26,78.55 v2(85.26,79.24) ; v2(85.26,79.24) 85.26,79.94 ; v2(85.26,79.24) 84.57,79.24 ; v2(85.26,79.24) 85.96,79.24 ; v2(91.26,39.24) 91.26,39.94 ; v2(91.26,39.24) 91.26,38.55 ; v2(91.26,39.24) 90.57,39.24 ; v2(91.26,39.24) 91.96,39.24 ; v2(39.26,17.24) 39.96,17.24 ; v2(39.26,17.24) 38.57,17.24 ; v2(39.26,17.24) 39.26,16.55 ; v2(39.26,17.24) 39.26,17.94 ; v2(89.26,37.24) 89.26,37.94 ; v2(89.26,37.24) 89.26,36.55 ; v2(89.26,37.24) 89.96,37.24 ; v2(89.26,37.24) 88.57,37.24 ; 68.57,87.24 v2(69.26,87.24) ; v2(69.26,87.24) 69.26,87.94 ; v2(69.26,87.24) 69.96,87.24 ; 43.26,16.55 v2(43.26,17.24) ; v2(43.26,17.24) 43.96,17.24 ; v2(43.26,17.24) 42.57,17.24 ; v2(43.26,17.24) 43.26,17.94 ; 10.57,39.24 v2(11.26,39.24) ; v2(11.26,39.24) 11.26,39.94 ; v2(11.26,39.24) 11.96,39.24 ; v2(11.26,39.24) 11.26,38.55 ; 20.57,37.24 v2(21.26,37.24) ; v2(21.26,37.24) 21.26,37.94 ; v2(21.26,37.24) 21.26,36.55 ; v2(21.26,37.24) 21.96,37.24 ; 3.26,34.55 v2(3.26,35.24) ; v2(3.26,35.24) 2.57,35.24 ; v2(3.26,35.24) 3.26,35.94 ; v2(3.26,35.24) 3.96,35.24 ; v2(41.26,89.24) 41.96,89.24 ; v2(41.26,89.24) 40.57,89.24 ; v2(41.26,89.24) 41.26,89.94 ; v2(41.26,89.24) 41.26,88.55 ; v2(81.26,81.24) 81.96,81.24 ; v2(81.26,81.24) 80.57,81.24 ; v2(81.26,81.24) 81.26,80.55 ; v2(81.26,81.24) 81.26,81.94 ; 94.2,70.64 v2(94.2,71.34) 93.5,71.34 ; 90.57,23.24 v2(91.26,23.24) ; v2(91.26,23.24) 91.96,23.24 ; v2(91.26,23.24) 91.26,23.94 ; v2(91.26,23.24) 91.26,22.55 ; v2(69.26,93.24) 69.26,93.94 ; v2(69.26,93.24) 69.26,92.55 ; v2(69.26,93.24) 68.57,93.24 ; v2(69.26,93.24) 69.96,93.24 ; 17.52,92.64 J6.3 ; J6.3 18.98,92.64 ; J6.3 17.52,91.18 ; J6.3 18.98,91.18 ; v2(81.26,37.24) 81.96,37.24 ; v2(81.26,37.24) 80.57,37.24 ; v2(81.26,37.24) 81.26,36.55 ; v2(81.26,37.24) 81.26,37.94 ; 14.57,3.24 v2(15.26,3.24) ; v2(15.26,3.24) 15.26,3.94 ; v2(15.26,3.24) 15.26,2.55 ; v2(15.26,3.24) 15.96,3.24 ; 85.26,74.55 v2(85.26,75.24) ; v2(85.26,75.24) 85.96,75.24 ; v2(85.26,75.24) 85.26,75.94 ; v2(85.26,75.24) 84.57,75.24 ; v2(31.26,69.24) 31.96,69.24 ; v2(31.26,69.24) 31.26,69.94 ; v2(31.26,69.24) 31.26,68.55 ; v2(31.26,69.24) 30.57,69.24 ; v2(65.26,87.24) 65.96,87.24 ; v2(65.26,87.24) 65.26,87.94 ; v2(65.26,87.24) 64.57,87.24 ; v2(17.26,43.24) 17.96,43.24 ; v2(17.26,43.24) 17.26,42.55 ; v2(17.26,43.24) 17.26,43.94 ; v2(17.26,43.24) 16.57,43.24 ; v2(7.26,29.24) 7.26,29.94 ; v2(7.26,29.24) 6.57,29.24 ; v2(7.26,29.24) 7.96,29.24 ; v2(7.26,29.24) 7.26,28.55 ; J16.3 97.72,8.82 ; J16.3 97.72,7.36 ; J16.3 96.26,7.36 ; J16.3 96.26,8.82 ; 18.57,37.24 v2(19.26,37.24) ; v2(19.26,37.24) 19.26,36.55 ; v2(19.26,37.24) 19.96,37.24 ; v2(19.26,37.24) 19.26,37.94 ; v2(91.26,17.24) 91.96,17.24 ; v2(91.26,17.24) 91.26,17.94 ; v2(91.26,17.24) 91.26,16.55 ; v2(91.26,17.24) 90.57,17.24 ; 92.57,23.24 v2(93.26,23.24) ; v2(93.26,23.24) 93.96,23.24 ; v2(93.26,23.24) 93.26,23.94 ; v2(93.26,23.24) 93.26,22.55 ; 3.26,76.55 v2(3.26,77.24) ; v2(3.26,77.24) 3.96,77.24 ; v2(3.26,77.24) 2.57,77.24 ; v2(3.26,77.24) 3.26,77.94 ; v2(13.26,41.24) 13.96,41.24 ; v2(13.26,41.24) 13.26,40.55 ; v2(13.26,41.24) 12.57,41.24 ; v2(13.26,41.24) 13.26,41.94 ; v2(39.26,13.24) 39.96,13.24 ; v2(39.26,13.24) 38.57,13.24 ; v2(39.26,13.24) 39.26,13.94 ; v2(39.26,13.24) 39.26,12.55 ; v2(11.26,41.24) 11.26,41.94 ; v2(11.26,41.24) 10.57,41.24 ; v2(11.26,41.24) 11.96,41.24 ; v2(11.26,41.24) 11.26,40.55 ; 92.57,21.24 v2(93.26,21.24) ; v2(93.26,21.24) 93.26,20.55 ; v2(93.26,21.24) 93.96,21.24 ; v2(93.26,21.24) 93.26,21.94 ; 79.26,80.55 v2(79.26,81.24) ; v2(79.26,81.24) 78.57,81.24 ; v2(79.26,81.24) 79.96,81.24 ; v2(79.26,81.24) 79.26,81.94 ; 75.46,57.87 v2(76.16,57.87) ; v2(76.16,57.87) 76.16,58.57 ; v2(76.16,57.87) 76.16,57.18 ; v2(76.16,57.87) 76.86,57.87 ; 43.26,12.55 v2(43.26,13.24) ; v2(43.26,13.24) 42.57,13.24 ; v2(43.26,13.24) 43.96,13.24 ; v2(43.26,13.24) 43.26,13.94 ; v2(57.26,81.24) 57.96,81.24 ; v2(57.26,81.24) 57.26,80.55 ; v2(57.26,81.24) 57.26,81.94 ; v2(57.26,81.24) 56.57,81.24 ; 45.26,82.55 v2(45.26,83.24) ; v2(45.26,83.24) 45.26,83.94 ; v2(45.26,83.24) 45.96,83.24 ; v2(45.26,83.24) 44.57,83.24 ; 17.26,40.55 v2(17.26,41.24) ; v2(17.26,41.24) 17.96,41.24 ; v2(17.26,41.24) 16.57,41.24 ; v2(17.26,41.24) 17.26,41.94 ; 4.57,71.24 v2(5.26,71.24) ; v2(5.26,71.24) 5.96,71.24 ; v2(5.26,71.24) 5.26,71.94 ; v2(5.26,71.24) 5.26,70.55 ; v2(85.26,55.24) 85.26,55.94 ; v2(85.26,55.24) 85.26,54.55 ; v2(85.26,55.24) 84.57,55.24 ; v2(85.26,55.24) 85.96,55.24 ; v1(94.2,46.44) 94.7,46.44 ; v1(94.2,46.44) 94.2,45.94 ; v1(94.2,46.44) 93.69,46.44 ; v2(11.26,35.24) 11.26,35.94 ; v2(11.26,35.24) 10.57,35.24 ; v2(11.26,35.24) 11.96,35.24 ; v2(11.26,35.24) 11.26,34.55 ; 5.26,68.55 v2(5.26,69.24) ; v2(5.26,69.24) 4.57,69.24 ; v2(5.26,69.24) 5.96,69.24 ; v2(5.26,69.24) 5.26,69.94 ; v2(11.26,77.24) 11.26,77.94 ; v2(11.26,77.24) 11.96,77.24 ; v2(11.26,77.24) 11.26,76.55 ; v2(11.26,77.24) 10.57,77.24 ; v2(67.26,93.24) 67.96,93.24 ; v2(67.26,93.24) 66.57,93.24 ; v2(67.26,93.24) 67.26,93.94 ; v2(67.26,93.24) 67.26,92.55 ; v2(5.26,79.24) 5.26,79.94 ; v2(5.26,79.24) 5.26,78.55 ; v2(5.26,79.24) 4.57,79.24 ; 52.57,95.24 v2(53.26,95.24) ; v2(53.26,95.24) 53.26,95.94 ; v2(53.26,95.24) 53.26,94.55 ; v2(53.26,95.24) 53.96,95.24 ; 7.36,92.64 J5.3 ; J5.3 8.82,92.64 ; J5.3 8.82,91.18 ; J5.3 7.36,91.18 ; v2(87.26,39.24) 87.26,39.94 ; v2(87.26,39.24) 86.57,39.24 ; v2(87.26,39.24) 87.26,38.55 ; v2(87.26,39.24) 87.96,39.24 ; 95.72,62 v2(95.72,62.7) ; v2(95.72,62.7) 95.02,62.7 ; v2(95.72,62.7) 95.72,63.4 ; 93.26,26.55 v2(93.26,27.24) ; v2(93.26,27.24) 93.96,27.24 ; v2(93.26,27.24) 92.57,27.24 ; v2(93.26,27.24) 93.26,27.94 ; v2(13.26,11.24) 13.96,11.24 ; v2(13.26,11.24) 13.26,10.55 ; v2(13.26,11.24) 13.26,11.94 ; v2(13.26,11.24) 12.57,11.24 ; v2(13.26,45.24) 13.26,45.94 ; v2(13.26,45.24) 13.26,44.55 ; v2(13.26,45.24) 13.96,45.24 ; v2(13.26,45.24) 12.57,45.24 ; 78.57,55.24 v2(79.26,55.24) ; v2(79.26,55.24) 79.96,55.24 ; v2(79.26,55.24) 79.26,54.55 ; v2(79.26,55.24) 79.26,55.94 ; v2(89.26,19.24) 89.96,19.24 ; v2(89.26,19.24) 89.26,19.94 ; v2(89.26,19.24) 89.26,18.55 ; v2(89.26,19.24) 88.57,19.24 ; v2(71.26,95.24) 71.26,95.94 ; v2(71.26,95.24) 71.96,95.24 ; v2(71.26,95.24) 71.26,94.55 ; v2(71.26,95.24) 70.57,95.24 ; 7.26,70.55 v2(7.26,71.24) ; v2(7.26,71.24) 7.26,71.94 ; v2(7.26,71.24) 7.96,71.24 ; v2(7.26,71.24) 6.57,71.24 ; v2(93.26,29.24) 93.26,29.94 ; v2(93.26,29.24) 92.57,29.24 ; v2(93.26,29.24) 93.26,28.55 ; v2(93.26,29.24) 93.96,29.24
  TOP w0.254: 97.82,49.46 97.6,49.24 J11.8 ; 97.82,49.46 97.82,46.96 97.62,46.76 96.75,46.76 J11.13 93.9,46.74 ; 97.82,49.46 97.82,51.53 97.62,51.72 96.75,51.72 J11.3 ; U3.2 59.91,46.95 U3.9
  TOP w0.508: J12.1 3.83,48.48 3.77,48.48 ; J12.1 3.77,43.45 3.77,43.4 ; J12.1 8.85,43.45 8.85,43.4 ; J12.1 8.8,48.48 8.85,48.48
  BOTTOM w0.203: v2(11.26,39.24) 11.96,39.24 ; v2(11.26,39.24) 11.26,38.55 ; v2(11.26,39.24) 10.57,39.24 ; v2(11.26,39.24) 11.26,39.94 ; v2(9.26,37.24) 9.26,37.94 ; v2(9.26,37.24) 9.96,37.24 ; v2(9.26,37.24) 9.26,36.55 ; v2(9.26,37.24) 8.57,37.24 ; 3.26,26.55 v2(3.26,27.24) ; v2(3.26,27.24) 3.26,27.94 ; v2(3.26,27.24) 2.57,27.24 ; v2(3.26,27.24) 3.96,27.24 ; v2(95.26,79.24) 95.26,79.94 ; v2(95.26,79.24) 95.26,78.55 ; v2(95.26,79.24) 95.96,79.24 ; v2(95.26,79.24) 94.57,79.24 ; v2(43.26,17.24) 43.26,17.94 ; v2(43.26,17.24) 43.96,17.24 ; v2(43.26,17.24) 43.26,16.55 ; v2(43.26,17.24) 42.57,17.24 ; 12.57,17.24 v2(13.26,17.24) ; v2(13.26,17.24) 13.96,17.24 ; v2(13.26,17.24) 13.26,16.55 ; v2(13.26,17.24) 13.26,17.94 ; v2(87.26,87.24) 87.26,87.94 ; v2(87.26,87.24) 86.57,87.24 ; v2(87.26,87.24) 87.96,87.24 ; 15.26,38.55 v2(15.26,39.24) ; v2(15.26,39.24) 15.96,39.24 ; v2(15.26,39.24) 14.57,39.24 ; v2(15.26,39.24) 15.26,39.94 ; 94.2,45.94 v1(94.2,46.44) ; v1(94.2,46.44) 94.7,46.44 ; v1(94.2,46.44) 94.2,46.95 ; v1(94.2,46.44) 93.69,46.44 ; 89.26,36.55 v2(89.26,37.24) ; v2(89.26,37.24) 89.26,37.94 ; v2(89.26,37.24) 89.96,37.24 ; v2(89.26,37.24) 88.57,37.24 ; v2(13.26,15.24) 13.26,15.94 ; v2(13.26,15.24) 12.57,15.24 ; v2(13.26,15.24) 13.96,15.24 ; v2(13.26,15.24) 13.26,14.55 ; 17.26,34.55 v2(17.26,35.24) ; v2(17.26,35.24) 17.96,35.24 ; v2(17.26,35.24) 17.26,35.94 ; v2(17.26,35.24) 16.57,35.24 ; J10.17 60.89,72.32 ; J10.17 60.89,70.86 ; J10.17 59.43,70.86 ; J10.17 59.43,72.32 ; 51.26,92.55 v2(51.26,93.24) ; v2(51.26,93.24) 50.57,93.24 ; v2(51.26,93.24) 51.26,93.94 ; v2(51.26,93.24) 51.96,93.24 ; v2(13.26,45.24) 13.96,45.24 ; v2(13.26,45.24) 12.57,45.24 ; v2(13.26,45.24) 13.26,45.94 ; v2(13.26,45.24) 13.26,44.55 ; 56.57,77.24 v2(57.26,77.24) ; v2(57.26,77.24) 57.96,77.24 ; v2(57.26,77.24) 57.26,77.94 ; v2(57.26,77.24) 57.26,76.55 ; v2(9.26,69.24) 9.96,69.24 ; v2(9.26,69.24) 9.26,68.55 ; v2(9.26,69.24) 9.26,69.94 ; v2(9.26,69.24) 8.57,69.24 ; v2(49.26,93.24) 49.26,93.94 ; v2(49.26,93.24) 48.57,93.24 ; v2(49.26,93.24) 49.26,92.55 ; v2(49.26,93.24) 49.96,93.24 ; 49.26,4.55 v2(49.26,5.24) ; v2(49.26,5.24) 49.96,5.24 ; v2(49.26,5.24) 48.57,5.24 ; v2(47.26,63.24) 47.96,63.24 ; v2(47.26,63.24) 47.26,63.94 ; v2(47.26,63.24) 46.57,63.24 ; v2(47.26,63.24) 47.26,62.55 ; v2(19.26,35.24) 19.96,35.24 ; v2(19.26,35.24) 18.57,35.24 ; v2(19.26,35.24) 19.26,35.94 ; v2(19.26,35.24) 19.26,34.55 ; v2(91.26,21.24) 91.26,21.94 ; v2(91.26,21.24) 91.96,21.24 ; v2(91.26,21.24) 90.57,21.24 ; v2(91.26,21.24) 91.26,20.55 ; 15.26,40.55 v2(15.26,41.24) ; v2(15.26,41.24) 15.26,41.94 ; v2(15.26,41.24) 14.57,41.24 ; v2(15.26,41.24) 15.96,41.24 ; v2(5.26,77.24) 5.26,77.94 ; v2(5.26,77.24) 4.57,77.24 ; v2(5.26,77.24) 5.96,77.24 ; v2(5.26,77.24) 5.26,76.55 ; v2(17.26,37.24) 17.96,37.24 ; v2(17.26,37.24) 17.26,36.55 ; v2(17.26,37.24) 16.57,37.24 ; v2(17.26,37.24) 17.26,37.94 ; 40.57,15.24 v2(41.26,15.24) ; v2(41.26,15.24) 41.26,15.94 ; v2(41.26,15.24) 41.26,14.55 ; v2(41.26,15.24) 41.96,15.24 ; v2(71.26,89.24) 71.26,89.94 ; v2(71.26,89.24) 71.26,88.55 ; v2(71.26,89.24) 71.96,89.24 ; v2(71.26,89.24) 70.57,89.24 ; v2(3.26,85.24) 3.26,85.94 ; v2(3.26,85.24) 3.26,84.55 ; v2(3.26,85.24) 2.57,85.24 ; v2(3.26,85.24) 3.96,85.24 ; 65.26,88.55 v2(65.26,89.24) ; v2(65.26,89.24) 65.96,89.24 ; v2(65.26,89.24) 65.26,89.94 ; v2(65.26,89.24) 64.57,89.24 ; 94.57,77.24 v2(95.26,77.24) ; v2(95.26,77.24) 95.96,77.24 ; v2(95.26,77.24) 95.26,76.55 ; v2(95.26,77.24) 95.26,77.94 ; v2(45.26,65.24) 45.26,65.94 ; v2(45.26,65.24) 45.26,64.55 ; v2(45.26,65.24) 45.96,65.24 ; v2(45.26,65.24) 44.57,65.24 ; v2(7.26,29.24) 7.96,29.24 ; v2(7.26,29.24) 7.26,28.55 ; v2(7.26,29.24) 6.57,29.24 ; v2(7.26,29.24) 7.26,29.94 ; v2(13.26,3.24) 13.96,3.24 ; v2(13.26,3.24) 13.26,2.55 ; v2(13.26,3.24) 12.57,3.24 ; v2(13.26,3.24) 13.26,3.94 ; 14.57,11.24 v2(15.26,11.24) ; v2(15.26,11.24) 15.26,10.55 ; v2(15.26,11.24) 15.26,11.94 ; v2(15.26,11.24) 15.96,11.24 ; 20.57,43.24 v2(21.26,43.24) ; v2(21.26,43.24) 21.96,43.24 ; v2(21.26,43.24) 21.26,43.94 ; v2(21.26,43.24) 21.26,42.55 ; 80.57,81.24 v2(81.26,81.24) ; v2(81.26,81.24) 81.26,80.55 ; v2(81.26,81.24) 81.96,81.24 ; v2(81.26,81.24) 81.26,81.94 ; v2(15.26,37.24) 15.96,37.24 ; v2(15.26,37.24) 15.26,36.55 ; v2(15.26,37.24) 14.57,37.24 ; v2(15.26,37.24) 15.26,37.94 ; v2(79.26,81.24) 79.26,81.94 ; v2(79.26,81.24) 78.57,81.24 ; v2(79.26,81.24) 79.26,80.55 ; v2(79.26,81.24) 79.96,81.24 ; v2(55.26,77.24) 55.26,77.94 ; v2(55.26,77.24) 55.26,76.55 ; v2(55.26,77.24) 55.96,77.24 ; v2(55.26,77.24) 54.57,77.24 ; 10.57,81.24 v2(11.26,81.24) ; v2(11.26,81.24) 11.96,81.24 ; v2(11.26,81.24) 11.26,80.55 ; v2(43.26,89.24) 43.96,89.24 ; v2(43.26,89.24) 43.26,89.94 ; v2(43.26,89.24) 42.57,89.24 ; v2(43.26,89.24) 43.26,88.55 ; v2(5.26,33.24) 5.96,33.24 ; v2(5.26,33.24) 5.26,33.94 ; v2(5.26,33.24) 5.26,32.55 ; v2(5.26,33.24) 4.57,33.24 ; v2(65.26,87.24) 65.96,87.24 ; v2(65.26,87.24) 65.26,87.94 ; v2(65.26,87.24) 64.57,87.24 ; v2(65.26,87.24) 65.26,86.55 ; v2(13.26,39.24) 13.96,39.24 ; v2(13.26,39.24) 13.26,38.55 ; v2(13.26,39.24) 13.26,39.94 ; v2(13.26,39.24) 12.57,39.24 ; v2(7.26,69.24) 7.26,69.94 ; v2(7.26,69.24) 6.57,69.24 ; v2(7.26,69.24) 7.26,68.55 ; v2(7.26,69.24) 7.96,69.24 ; 28.57,91.24 v2(29.26,91.24) ; v2(29.26,91.24) 29.26,90.55 ; v2(29.26,91.24) 29.96,91.24 ; v2(29.26,91.24) 29.26,91.94 ; v2(91.26,77.24) 91.26,77.94 ; v2(91.26,77.24) 90.57,77.24 ; v2(91.26,77.24) 91.96,77.24 ; v2(91.26,77.24) 91.26,76.55 ; v2(85.26,81.24) 85.26,81.94 ; v2(85.26,81.24) 85.26,80.55 ; v2(85.26,81.24) 85.96,81.24 ; v2(85.26,81.24) 84.57,81.24 ; 3.26,40.55 v2(3.26,41.24) ; v2(3.26,41.24) 3.96,41.24 ; v2(3.26,41.24) 2.57,41.24 ; v2(3.26,41.24) 3.26,41.94 ; 15.26,44.55 v2(15.26,45.24) ; v2(15.26,45.24) 15.26,45.94 ; v2(15.26,45.24) 15.96,45.24 ; v2(15.26,45.24) 14.57,45.24 ; 8.57,35.24 v2(9.26,35.24) ; v2(9.26,35.24) 9.96,35.24 ; v2(9.26,35.24) 9.26,34.55 ; v2(9.26,35.24) 9.26,35.94 ; 90.57,39.24 v2(91.26,39.24) ; v2(91.26,39.24) 91.26,38.55 ; v2(91.26,39.24) 91.26,39.94 ; 33.26,68.55 v2(33.26,69.24) ; v2(33.26,69.24) 33.26,69.94 ; v2(33.26,69.24) 33.96,69.24 ; v2(33.26,69.24) 32.57,69.24 ; 21.26,44.55 v2(21.26,45.24) ; v2(21.26,45.24) 21.96,45.24 ; v2(21.26,45.24) 21.26,45.94 ; v2(21.26,45.24) 20.57,45.24 ; 93.26,28.55 v2(93.26,29.24) ; v2(93.26,29.24) 92.57,29.24 ; v2(93.26,29.24) 93.26,29.94 ; J13.11 35.49,25.14 ; J13.11 34.03,26.6 ; J13.11 34.03,25.14 ; J13.11 35.49,26.6 ; v2(3.26,75.24) 3.96,75.24 ; v2(3.26,75.24) 3.26,74.55 ; v2(3.26,75.24) 2.57,75.24 ; v2(3.26,75.24) 3.26,75.94 ; 96.26,8.82 J16.3 ; J16.3 96.26,7.36 ; J16.3 97.72,7.36 ; J16.3 97.72,8.82 ; 67.26,94.55 v2(67.26,95.24) ; v2(67.26,95.24) 67.26,95.94 ; v2(67.26,95.24) 66.57,95.24 ; v2(67.26,95.24) 67.96,95.24 ; v2(71.26,93.24) 71.96,93.24 ; v2(71.26,93.24) 71.26,92.55 ; v2(71.26,93.24) 70.57,93.24 ; v2(71.26,93.24) 71.26,93.94 ; v2(93.26,79.24) 93.96,79.24 ; v2(93.26,79.24) 93.26,79.94 ; v2(93.26,79.24) 93.26,78.55 ; v2(93.26,79.24) 92.57,79.24 ; v2(87.26,39.24) 87.96,39.24 ; v2(87.26,39.24) 87.26,39.94 ; v2(87.26,39.24) 87.26,38.55 ; v2(87.26,39.24) 86.57,39.24 ; 2.57,79.24 v2(3.26,79.24) ; v2(3.26,79.24) 3.26,78.55 ; v2(3.26,79.24) 3.26,79.94 ; v2(3.26,79.24) 3.96,79.24 ; 10.57,11.24 v2(11.26,11.24) ; v2(11.26,11.24) 11.26,10.55 ; v2(11.26,11.24) 11.26,11.94 ; v2(11.26,11.24) 11.96,11.24 ; v2(5.26,69.24) 5.26,69.94 ; v2(5.26,69.24) 5.96,69.24 ; v2(5.26,69.24) 4.57,69.24 ; v2(5.26,69.24) 5.26,68.55 ; 18.57,45.24 v2(19.26,45.24) ; v2(19.26,45.24) 19.96,45.24 ; v2(19.26,45.24) 19.26,45.94 ; v2(19.26,45.24) 19.26,44.55 ; 2.57,69.24 v2(3.26,69.24) ; v2(3.26,69.24) 3.96,69.24 ; v2(3.26,69.24) 3.26,69.94 ; v2(3.26,69.24) 3.26,68.55 ; v2(93.26,21.24) 93.26,21.94 ; v2(93.26,21.24) 92.57,21.24 ; v2(93.26,21.24) 93.26,20.55 ; 50.57,3.24 v2(51.26,3.24) ; v2(51.26,3.24) 51.96,3.24 ; v2(51.26,3.24) 51.26,3.94 ; v2(51.26,3.24) 51.26,2.55 ; v2(13.26,9.24) 13.96,9.24 ; v2(13.26,9.24) 13.26,8.55 ; v2(13.26,9.24) 12.57,9.24 ; v2(13.26,9.24) 13.26,9.94 ; 19.81,74.86 J9.8 ; J9.8 19.81,73.4 ; J9.8 21.26,73.4 ; J9.8 21.26,74.86 ; v2(11.26,77.24) 11.26,77.94 ; v2(11.26,77.24) 11.26,76.55 ; v2(11.26,77.24) 10.57,77.24 ; v2(11.26,77.24) 11.96,77.24 ; v2(79.26,57.24) 79.26,57.94 ; v2(79.26,57.24) 78.57,57.24 ; v2(79.26,57.24) 79.26,56.55 ; v2(79.26,57.24) 79.96,57.24 ; v2(73.11,60.92) 73.81,60.92 ; v2(73.11,60.92) 73.11,61.62 ; v2(73.11,60.92) 73.11,60.22 ; v2(73.11,60.92) 72.42,60.92 ; 7.26,24.55 v2(7.26,25.24) ; v2(7.26,25.24) 6.57,25.24 ; v2(7.26,25.24) 7.96,25.24 ; v2(7.26,25.24) 7.26,25.94 ; v2(3.26,35.24) 3.26,35.94 ; v2(3.26,35.24) 2.57,35.24 ; v2(3.26,35.24) 3.96,35.24 ; v2(3.26,35.24) 3.26,34.55 ; v2(81.26,35.24) 81.26,35.94 ; v2(81.26,35.24) 80.57,35.24 ; v2(81.26,35.24) 81.26,34.55 ; v2(81.26,35.24) 81.96,35.24 ; v2(81.26,79.24) 81.96,79.24 ; v2(81.26,79.24) 81.26,79.94 ; v2(81.26,79.24) 80.57,79.24 ; v2(81.26,79.24) 81.26,78.55 ; 11.26,78.55 v2(11.26,79.24) ; v2(11.26,79.24) 10.57,79.24 ; v2(11.26,79.24) 11.96,79.24 ; v2(11.26,79.24) 11.26,79.94 ; v2(5.26,21.24) 5.96,21.24 ; v2(5.26,21.24) 5.26,21.94 ; v2(5.26,21.24) 4.57,21.24 ; v2(5.26,21.24) 5.26,20.55 ; 29.26,69.94 v2(29.26,69.24) 29.96,69.24 ; 7.36,8.82 J15.3 ; J15.3 8.82,8.82 ; J15.3 8.82,7.36 ; J15.3 7.36,7.36 ; v2(25.26,91.24) 25.96,91.24 ; v2(25.26,91.24) 25.26,91.94 ; v2(25.26,91.24) 24.57,91.24 ; v2(25.26,91.24) 25.26,90.55 ; 87.26,16.55 v2(87.26,17.24) ; v2(87.26,17.24) 86.57,17.24 ; v2(87.26,17.24) 87.26,17.94 ; v2(87.26,17.24) 87.96,17.24 ; v2(5.26,75.24) 5.26,75.94 ; v2(5.26,75.24) 5.96,75.24 ; v2(5.26,75.24) 4.57,75.24 ; v2(5.26,75.24) 5.26,74.55 ; v2(7.26,35.24) 7.26,35.94 ; v2(7.26,35.24) 6.57,35.24 ; v2(7.26,35.24) 7.96,35.24 ; v2(7.26,35.24) 7.26,34.55 ; v2(33.26,77.24) 33.26,77.94 ; v2(33.26,77.24) 33.96,77.24 ; v2(33.26,77.24) 32.57,77.24 ; v2(33.26,77.24) 33.26,76.55 ; 42.57,15.24 v2(43.26,15.24) ; v2(43.26,15.24) 43.96,15.24 ; v2(43.26,15.24) 43.26,14.55 ; v2(43.26,15.24) 43.26,15.94 ; v2(11.26,35.24) 11.26,35.94 ; v2(11.26,35.24) 10.57,35.24 ; v2(11.26,35.24) 11.26,34.55 ; v2(11.26,35.24) 11.96,35.24 ; v2(47.26,95.24) 47.26,95.94 ; v2(47.26,95.24) 47.26,94.55 ; v2(47.26,95.24) 47.96,95.24 ; v2(47.26,95.24) 46.57,95.24 ; 3.26,22.55 v2(3.26,23.24) ; v2(3.26,23.24) 2.57,23.24 ; v2(3.26,23.24) 3.26,23.94 ; v2(3.26,23.24) 3.96,23.24 ; 83.26,80.55 v2(83.26,81.24) ; v2(83.26,81.24) 83.96,81.24 ; v2(83.26,81.24) 83.26,81.94 ; v2(83.26,81.24) 82.57,81.24 ; v2(13.26,37.24) 13.26,37.94 ; v2(13.26,37.24) 12.57,37.24 ; v2(13.26,37.24) 13.96,37.24 ; v2(13.26,37.24) 13.26,36.55 ; 71.26,86.55 v2(71.26,87.24) ; v2(71.26,87.24) 71.96,87.24 ; v2(71.26,87.24) 71.26,87.94 ; v2(71.26,87.24) 70.57,87.24 ; v2(45.26,15.24) 45.96,15.24 ; v2(45.26,15.24) 45.26,15.94 ; v2(45.26,15.24) 45.26,14.55 ; v2(45.26,15.24) 44.57,15.24 ; 74.64,58.7 v2(74.64,59.4) ; v2(74.64,59.4) 73.94,59.4 ; v2(74.64,59.4) 75.34,59.4 ; v2(74.64,59.4) 74.64,60.1 ; 2.57,17.24 v2(3.26,17.24) ; v2(3.26,17.24) 3.26,17.94 ; v2(3.26,17.24) 3.96,17.24 ; v2(3.26,17.24) 3.26,16.55 ; v2(9.26,41.24) 9.26,41.94 ; v2(9.26,41.24) 8.57,41.24 ; v2(9.26,41.24) 9.96,41.24 ; v2(9.26,41.24) 9.26,40.55 ; 83.26,34.55 v2(83.26,35.24) ; v2(83.26,35.24) 82.57,35.24 ; v2(83.26,35.24) 83.96,35.24 ; v2(83.26,35.24) 83.26,35.94 ; v2(73.26,77.24) 73.26,77.94 ; v2(73.26,77.24) 72.57,77.24 ; v2(73.26,77.24) 73.96,77.24 ; v2(73.26,77.24) 73.26,76.55 ; 53.26,2.55 v2(53.26,3.24) ; v2(53.26,3.24) 53.96,3.24 ; v2(53.26,3.24) 52.57,3.24 ; v2(53.26,3.24) 53.26,3.94 ; 10.57,3.24 v2(11.26,3.24) ; v2(11.26,3.24) 11.96,3.24 ; v2(11.26,3.24) 11.26,3.94 ; v2(11.26,3.24) 11.26,2.55 ; 21.26,40.55 v2(21.26,41.24) ; v2(21.26,41.24) 20.57,41.24 ; v2(21.26,41.24) 21.26,41.94 ; v2(21.26,41.24) 21.96,41.24 ; v2(19.26,39.24) 19.96,39.24 ; v2(19.26,39.24) 19.26,38.55 ; v2(19.26,39.24) 19.26,39.94 ; v2(19.26,39.24) 18.57,39.24 ; 13.26,34.55 v2(13.26,35.24) ; v2(13.26,35.24) 13.26,35.94 ; v2(13.26,35.24) 12.57,35.24 ; v2(13.26,35.24) 13.96,35.24 ; 61.26,80.55 v2(61.26,81.24) ; v2(61.26,81.24) 61.96,81.24 ; v2(61.26,81.24) 60.57,81.24 ; v2(61.26,81.24) 61.26,81.94 ; v2(69.26,95.24) 69.26,95.94 ; v2(69.26,95.24) 69.26,94.55 ; v2(69.26,95.24) 69.96,95.24 ; v2(69.26,95.24) 68.57,95.24 ; v2(91.26,79.24) 91.96,79.24 ; v2(91.26,79.24) 90.57,79.24 ; v2(91.26,79.24) 91.26,78.55 ; v2(91.26,79.24) 91.26,79.94 ; 82.57,83.24 v2(83.26,83.24) ; v2(83.26,83.24) 83.26,82.55 ; v2(83.26,83.24) 83.96,83.24 ; v2(83.26,83.24) 83.26,83.94 ; v2(89.26,39.24) 89.26,39.94 ; v2(89.26,39.24) 88.57,39.24 ; v2(89.26,39.24) 89.26,38.55 ; v2(89.26,39.24) 89.96,39.24 ; 81.26,56.55 v2(81.26,57.24) ; v2(81.26,57.24) 81.26,57.94 ; v2(81.26,57.24) 80.57,57.24 ; v2(81.26,57.24) 81.96,57.24 ; 96.26,96.45 J3.3 ; J3.3 97.72,96.45 ; J3.3 97.72,94.99 ; J3.3 96.26,94.99 ; v2(45.26,17.24) 45.26,17.94 ; v2(45.26,17.24) 45.26,16.55 ; v2(45.26,17.24) 44.57,17.24 ; v2(45.26,17.24) 45.96,17.24 ; 4.57,23.24 v2(5.26,23.24) ; v2(5.26,23.24) 5.96,23.24 ; v2(5.26,23.24) 5.26,23.94 ; v2(5.26,23.24) 5.26,22.55 ; v2(5.26,79.24) 5.96,79.24 ; v2(5.26,79.24) 5.26,78.55 ; v2(5.26,79.24) 5.26,79.94 ; v2(5.26,79.24) 4.57,79.24 ; v2(91.26,63.24) 91.26,63.94 ; v2(91.26,63.24) 90.57,63.24 ; v2(91.26,63.24) 91.26,62.55 ; v2(91.26,63.24) 91.96,63.24 ; v2(15.26,43.24) 15.96,43.24 ; v2(15.26,43.24) 15.26,42.55 ; v2(15.26,43.24) 14.57,43.24 ; v2(15.26,43.24) 15.26,43.94 ; 29.17,57.53 v2(29.17,58.22) ; v2(29.17,58.22) 29.17,58.92 ; v2(29.17,58.22) 29.87,58.22 ; v2(29.17,58.22) 28.47,58.22 ; v2(3.26,19.24) 3.96,19.24 ; v2(3.26,19.24) 2.57,19.24 ; v2(3.26,19.24) 3.26,19.94 ; v2(3.26,19.24) 3.26,18.55 ; v2(71.26,77.24) 71.96,77.24 ; v2(71.26,77.24) 71.26,77.94 ; v2(71.26,77.24) 70.57,77.24 ; v2(71.26,77.24) 71.26,76.55 ; 56.57,95.24 v2(57.26,95.24) ; v2(57.26,95.24) 57.96,95.24 ; v2(57.26,95.24) 57.26,95.94 ; v2(57.26,95.24) 57.26,94.55 ; 6.57,71.24 v2(7.26,71.24) ; v2(7.26,71.24) 7.26,70.55 ; v2(7.26,71.24) 7.96,71.24 ; v2(7.26,71.24) 7.26,71.94 ; v2(43.26,13.24) 43.26,13.94 ; v2(43.26,13.24) 42.57,13.24 ; v2(43.26,13.24) 43.26,12.55 ; v2(43.26,13.24) 43.96,13.24 ; 72.13,70.86 J10.27 ; J10.27 73.59,70.86 ; J10.27 73.59,72.32 ; J10.27 72.13,72.32 ; v2(3.26,25.24) 3.96,25.24 ; v2(3.26,25.24) 2.57,25.24 ; v2(3.26,25.24) 3.26,25.94 ; v2(3.26,25.24) 3.26,24.55 ; v2(19.26,41.24) 19.26,41.94 ; v2(19.26,41.24) 19.26,40.55 ; v2(19.26,41.24) 19.96,41.24 ; v2(19.26,41.24) 18.57,41.24 ; 66.57,89.24 v2(67.26,89.24) ; v2(67.26,89.24) 67.26,88.55 ; v2(67.26,89.24) 67.96,89.24 ; v2(67.26,89.24) 67.26,89.94 ; 11.26,40.55 v2(11.26,41.24) ; v2(11.26,41.24) 11.96,41.24 ; v2(11.26,41.24) 11.26,41.94 ; v2(11.26,41.24) 10.57,41.24 ; 66.57,93.24 v2(67.26,93.24) ; v2(67.26,93.24) 67.96,93.24 ; v2(67.26,93.24) 67.26,93.94 ; v2(67.26,93.24) 67.26,92.55 ; 46.57,5.24 v2(47.26,5.24) ; v2(47.26,5.24) 47.96,5.24 ; v2(47.26,5.24) 47.26,4.55 ; 76.57,95.24 v2(77.26,95.24) ; v2(77.26,95.24) 77.26,95.94 ; v2(77.26,95.24) 77.26,94.55 ; v2(77.26,95.24) 77.96,95.24 ; 43.26,82.55 v2(43.26,83.24) ; v2(43.26,83.24) 43.96,83.24 ; v2(43.26,83.24) 43.26,83.94 ; v2(43.26,83.24) 42.57,83.24 ; 29.17,59.53 v2(29.17,60.22) ; v2(29.17,60.22) 29.17,60.92 ; v2(29.17,60.22) 29.87,60.22 ; v2(29.17,60.22) 28.47,60.22 ; 7.36,96.45 J1.3 ; J1.3 8.82,96.45 ; J1.3 8.82,94.99 ; v2(31.26,69.24) 31.26,69.94 ; v2(31.26,69.24) 31.26,68.55 ; v2(31.26,69.24) 31.96,69.24 ; v2(31.26,69.24) 30.57,69.24 ; v2(13.26,43.24) 13.26,43.94 ; v2(13.26,43.24) 13.26,42.55 ; v2(13.26,43.24) 13.96,43.24 ; v2(13.26,43.24) 12.57,43.24 ; 29.17,55.53 v2(29.17,56.22) ; v2(29.17,56.22) 29.17,56.92 ; v2(29.17,56.22) 29.87,56.22 ; v2(29.17,56.22) 28.47,56.22 ; J10.22 65.97,73.4 ; J10.22 65.97,74.86 ; J10.22 64.51,74.86 ; J10.22 64.51,73.4 ; 66.57,87.24 v2(67.26,87.24) ; v2(67.26,87.24) 67.96,87.24 ; v2(67.26,87.24) 67.26,87.94 ; v2(67.26,87.24) 67.26,86.55 ; 4.57,27.24 v2(5.26,27.24) ; v2(5.26,27.24) 5.26,27.94 ; v2(5.26,27.24) 5.96,27.24 ; v2(5.26,27.24) 5.26,26.55 ; 92.57,23.24 v2(93.26,23.24) ; v2(93.26,23.24) 93.26,23.94 ; v2(93.26,23.24) 93.26,22.55 ; 85.26,54.55 v2(85.26,55.24) ; v2(85.26,55.24) 85.26,55.94 ; v2(85.26,55.24) 84.57,55.24 ; v2(85.26,55.24) 85.96,55.24 ; v2(91.26,19.24) 91.26,19.94 ; v2(91.26,19.24) 90.57,19.24 ; v2(91.26,19.24) 91.96,19.24 ; v2(91.26,19.24) 91.26,18.55 ; v2(3.26,83.24) 3.26,83.94 ; v2(3.26,83.24) 3.96,83.24 ; v2(3.26,83.24) 2.57,83.24 ; v2(3.26,83.24) 3.26,82.55 ; 3.99,43.67 J12.1 ; J12.1 8.63,43.67 ; J12.1 8.63,48.31 ; J12.1 3.99,48.31 ; 92.57,19.24 v2(93.26,19.24) ; v2(93.26,19.24) 93.26,18.55 ; v2(93.26,19.24) 93.26,19.94 ; v2(79.26,55.24) 79.26,55.94 ; v2(79.26,55.24) 79.26,54.55 ; v2(79.26,55.24) 78.57,55.24 ; v2(79.26,55.24) 79.96,55.24 ; v2(83.26,55.24) 83.26,55.94 ; v2(83.26,55.24) 83.26,54.55 ; v2(83.26,55.24) 82.57,55.24 ; v2(83.26,55.24) 83.96,55.24 ; v2(5.26,19.24) 5.26,19.94 ; v2(5.26,19.24) 4.57,19.24 ; v2(5.26,19.24) 5.96,19.24 ; v2(5.26,19.24) 5.26,18.55 ; 7.36,91.18 J5.3 ; J5.3 7.36,92.64 ; J5.3 8.82,92.64 ; J5.3 8.82,91.18 ; v2(91.26,23.24) 91.26,23.94 ; v2(91.26,23.24) 91.26,22.55 ; v2(91.26,23.24) 91.96,23.24 ; v2(91.26,23.24) 90.57,23.24 ; 96.26,92.64 J7.3 ; J7.3 97.72,92.64 ; J7.3 97.72,91.18 ; 17.52,96.45 J2.3 ; J2.3 18.98,96.45 ; J2.3 17.52,94.99 ; J2.3 18.98,94.99 ; 59.26,76.55 v2(59.26,77.24) ; v2(59.26,77.24) 58.57,77.24 ; v2(59.26,77.24) 59.26,77.94 ; v2(59.26,77.24) 59.96,77.24 ; v2(19.26,37.24) 19.96,37.24 ; v2(19.26,37.24) 19.26,37.94 ; v2(19.26,37.24) 18.57,37.24 ; v2(19.26,37.24) 19.26,36.55 ; v2(57.26,93.24) 57.26,93.94 ; v2(57.26,93.24) 56.57,93.24 ; v2(57.26,93.24) 57.96,93.24 ; v2(57.26,93.24) 57.26,92.55 ; v2(45.26,83.24) 45.96,83.24 ; v2(45.26,83.24) 45.26,82.55 ; v2(45.26,83.24) 45.26,83.94 ; v2(45.26,83.24) 44.57,83.24 ; 55.26,92.55 v2(55.26,93.24) ; v2(55.26,93.24) 54.57,93.24 ; v2(55.26,93.24) 55.96,93.24 ; v2(55.26,93.24) 55.26,93.94 ; v2(85.26,75.24) 85.96,75.24 ; v2(85.26,75.24) 84.57,75.24 ; v2(85.26,75.24) 85.26,75.94 ; v2(85.26,75.24) 85.26,74.55 ; 69.26,92.55 v2(69.26,93.24) ; v2(69.26,93.24) 68.57,93.24 ; v2(69.26,93.24) 69.96,93.24 ; v2(69.26,93.24) 69.26,93.94 ; v2(19.26,43.24) 19.26,43.94 ; v2(19.26,43.24) 18.57,43.24 ; v2(19.26,43.24) 19.96,43.24 ; v2(19.26,43.24) 19.26,42.55 ; 84.57,79.24 v2(85.26,79.24) ; v2(85.26,79.24) 85.26,79.94 ; v2(85.26,79.24) 85.96,79.24 ; v2(85.26,79.24) 85.26,78.55 ; v2(5.26,39.24) 5.96,39.24 ; v2(5.26,39.24) 5.26,39.94 ; v2(5.26,39.24) 5.26,38.55 ; v2(5.26,39.24) 4.57,39.24 ; 91.26,24.55 v2(91.26,25.24) ; v2(91.26,25.24) 91.96,25.24 ; v2(91.26,25.24) 90.57,25.24 ; v2(91.26,25.24) 91.26,25.94 ; 40.57,89.24 v2(41.26,89.24) ; v2(41.26,89.24) 41.26,88.55 ; v2(41.26,89.24) 41.96,89.24 ; v2(41.26,89.24) 41.26,89.94 ; v2(5.26,29.24) 5.26,29.94 ; v2(5.26,29.24) 5.26,28.55 ; v2(5.26,29.24) 5.96,29.24 ; v2(5.26,29.24) 4.57,29.24 ; J10.5 45.65,70.86 ; J10.5 45.65,72.32 ; J10.5 44.19,70.86 ; J10.5 44.19,72.32 ; v2(93.26,25.24) 93.26,25.94 ; v2(93.26,25.24) 92.57,25.24 ; v2(93.26,25.24) 93.26,24.55 ; v2(3.26,71.24) 3.26,71.94 ; v2(3.26,71.24) 3.96,71.24 ; v2(3.26,71.24) 2.57,71.24 ; v2(3.26,71.24) 3.26,70.55 ; v2(7.26,27.24) 7.96,27.24 ; v2(7.26,27.24) 7.26,27.94 ; v2(7.26,27.24) 6.57,27.24 ; v2(7.26,27.24) 7.26,26.55 ; 55.26,78.55 v2(55.26,79.24) ; v2(55.26,79.24) 55.26,79.94 ; v2(55.26,79.24) 54.57,79.24 ; v2(55.26,79.24) 55.96,79.24 ; 11.26,86.55 v2(11.26,87.24) ; v2(11.26,87.24) 10.57,87.24 ; v2(11.26,87.24) 11.96,87.24 ; v2(11.26,87.24) 11.26,87.94 ; v2(21.26,35.24) 21.96,35.24 ; v2(21.26,35.24) 20.57,35.24 ; v2(21.26,35.24) 21.26,35.94 ; v2(21.26,35.24) 21.26,34.55 ; v2(11.26,89.24) 11.26,89.94 ; v2(11.26,89.24) 11.26,88.55 ; v2(11.26,89.24) 10.57,89.24 ; v2(11.26,89.24) 11.96,89.24 ; v2(91.26,17.24) 91.96,17.24 ; v2(91.26,17.24) 90.57,17.24 ; v2(91.26,17.24) 91.26,16.55 ; v2(91.26,17.24) 91.26,17.94 ; 95.72,63.4 v2(95.72,62.7) 95.72,62 ; 90.57,29.24 v2(91.26,29.24) ; v2(91.26,29.24) 91.96,29.24 ; v2(91.26,29.24) 91.26,28.55 ; 36.76,88.83 J8.10 36.76,87.37 ; v2(3.26,29.24) 3.26,29.94 ; v2(3.26,29.24) 2.57,29.24 ; v2(3.26,29.24) 3.96,29.24 ; v2(3.26,29.24) 3.26,28.55 ; 57.26,78.55 v2(57.26,79.24) ; v2(57.26,79.24) 57.26,79.94 ; v2(57.26,79.24) 56.57,79.24 ; v2(57.26,79.24) 57.96,79.24 ; 82.57,79.24 v2(83.26,79.24) ; v2(83.26,79.24) 83.96,79.24 ; v2(83.26,79.24) 83.26,79.94 ; v2(83.26,79.24) 83.26,78.55 ; 84.57,57.24 v2(85.26,57.24) ; v2(85.26,57.24) 85.96,57.24 ; v2(85.26,57.24) 85.26,57.94 ; v2(85.26,57.24) 85.26,56.55 ; v2(41.26,13.24) 41.26,13.94 ; v2(41.26,13.24) 41.96,13.24 ; v2(41.26,13.24) 40.57,13.24 ; v2(41.26,13.24) 41.26,12.55 ; 90.57,33.24 v2(91.26,33.24) 91.26,33.94 ; v2(85.26,83.24) 85.26,83.94 ; v2(85.26,83.24) 84.57,83.24 ; v2(85.26,83.24) 85.26,82.55 ; v2(85.26,83.24) 85.96,83.24 ; v2(65.26,67.24) 65.96,67.24 ; v2(65.26,67.24) 64.57,67.24 ; v2(65.26,67.24) 65.26,66.55 ; v2(65.26,67.24) 65.26,67.94 ; v2(7.26,31.24) 7.96,31.24 ; v2(7.26,31.24) 7.26,30.55 ; v2(7.26,31.24) 6.57,31.24 ; v2(7.26,31.24) 7.26,31.94 ; 7.26,20.55 v2(7.26,21.24) ; v2(7.26,21.24) 7.26,21.94 ; v2(7.26,21.24) 6.57,21.24 ; v2(7.26,21.24) 7.96,21.24 ; v2(5.26,35.24) 5.26,35.94 ; v2(5.26,35.24) 5.26,34.55 ; v2(5.26,35.24) 4.57,35.24 ; v2(5.26,35.24) 5.96,35.24 ; v2(15.26,35.24) 15.26,35.94 ; v2(15.26,35.24) 14.57,35.24 ; v2(15.26,35.24) 15.96,35.24 ; v2(15.26,35.24) 15.26,34.55 ; 80.57,55.24 v2(81.26,55.24) ; v2(81.26,55.24) 81.96,55.24 ; v2(81.26,55.24) 81.26,55.94 ; v2(81.26,55.24) 81.26,54.55 ; v2(7.26,33.24) 7.96,33.24 ; v2(7.26,33.24) 7.26,33.94 ; v2(7.26,33.24) 7.26,32.55 ; v2(7.26,33.24) 6.57,33.24 ; v2(49.26,95.24) 49.26,95.94 ; v2(49.26,95.24) 49.96,95.24 ; v2(49.26,95.24) 49.26,94.55 ; v2(49.26,95.24) 48.57,95.24 ; 9.26,74.55 v2(9.26,75.24) ; v2(9.26,75.24) 9.96,75.24 ; v2(9.26,75.24) 9.26,75.94 ; v2(9.26,75.24) 8.57,75.24 ; 59.26,80.55 v2(59.26,81.24) ; v2(59.26,81.24) 59.96,81.24 ; v2(59.26,81.24) 59.26,81.94 ; v2(59.26,81.24) 58.57,81.24 ; 38.57,87.24 v2(39.26,87.24) ; v2(39.26,87.24) 39.26,86.55 ; v2(39.26,87.24) 39.26,87.94 ; v2(39.26,87.24) 39.96,87.24 ; v2(51.26,5.24) 51.96,5.24 ; v2(51.26,5.24) 50.57,5.24 ; v2(51.26,5.24) 51.26,4.55 ; v2(43.26,81.24) 43.96,81.24 ; v2(43.26,81.24) 42.57,81.24 ; v2(43.26,81.24) 43.26,80.55 ; v2(43.26,81.24) 43.26,81.94 ; v2(7.26,23.24) 7.96,23.24 ; v2(7.26,23.24) 7.26,23.94 ; v2(7.26,23.24) 7.26,22.55 ; v2(7.26,23.24) 6.57,23.24 ; 59.26,66.55 v2(59.26,67.24) ; v2(59.26,67.24) 59.26,67.94 ; v2(59.26,67.24) 58.57,67.24 ; v2(59.26,67.24) 59.96,67.24 ; v2(3.26,37.24) 3.96,37.24 ; v2(3.26,37.24) 3.26,37.94 ; v2(3.26,37.24) 2.57,37.24 ; v2(3.26,37.24) 3.26,36.55 ; 41.26,16.55 v2(41.26,17.24) ; v2(41.26,17.24) 40.57,17.24 ; v2(41.26,17.24) 41.26,17.94 ; v2(41.26,17.24) 41.96,17.24 ; v2(61.26,87.24) 61.96,87.24 ; v2(61.26,87.24) 61.26,87.94 ; v2(61.26,87.24) 60.57,87.24 ; v2(61.26,87.24) 61.26,86.55 ; v2(29.17,64.22) 29.87,64.22 ; v2(29.17,64.22) 29.17,64.92 ; v2(29.17,64.22) 29.17,63.53 ; v2(29.17,64.22) 28.47,64.22 ; v2(17.26,43.24) 17.26,43.94 ; v2(17.26,43.24) 17.26,42.55 ; v2(17.26,43.24) 17.96,43.24 ; v2(17.26,43.24) 16.57,43.24 ; v2(94.2,71.34) 94.2,72.03 ; v2(94.2,71.34) 93.5,71.34 ; v2(94.2,71.34) 94.89,71.34 ; v2(51.26,95.24) 51.26,95.94 ; v2(51.26,95.24) 51.96,95.24 ; v2(51.26,95.24) 51.26,94.55 ; v2(51.26,95.24) 50.57,95.24 ; 7.36,5.01 J18.3 ; J18.3 7.36,3.55 ; J18.3 8.82,5.01 ; J18.3 8.82,3.55 ; 16.57,45.24 v2(17.26,45.24) ; v2(17.26,45.24) 17.26,45.94 ; v2(17.26,45.24) 17.96,45.24 ; v2(17.26,45.24) 17.26,44.55 ; 2.57,33.24 v2(3.26,33.24) ; v2(3.26,33.24) 3.26,32.55 ; v2(3.26,33.24) 3.26,33.94 ; v2(3.26,33.24) 3.96,33.24 ; v2(70.07,63.97) 70.76,63.97 ; v2(70.07,63.97) 69.37,63.97 ; v2(70.07,63.97) 70.07,63.27 ; v2(70.07,63.97) 70.07,64.67 ; v2(3.26,73.24) 3.96,73.24 ; v2(3.26,73.24) 2.57,73.24 ; v2(3.26,73.24) 3.26,73.94 ; v2(3.26,73.24) 3.26,72.55 ; 60.57,89.24 v2(61.26,89.24) ; v2(61.26,89.24) 61.96,89.24 ; v2(61.26,89.24) 61.26,88.55 ; v2(61.26,89.24) 61.26,89.94 ; v2(55.26,81.24) 55.96,81.24 ; v2(55.26,81.24) 55.26,81.94 ; v2(55.26,81.24) 54.57,81.24 ; v2(55.26,81.24) 55.26,80.55 ; v2(9.26,77.24) 9.96,77.24 ; v2(9.26,77.24) 8.57,77.24 ; v2(9.26,77.24) 9.26,76.55 ; v2(9.26,77.24) 9.26,77.94 ; 4.57,25.24 v2(5.26,25.24) ; v2(5.26,25.24) 5.26,24.55 ; v2(5.26,25.24) 5.26,25.94 ; v2(5.26,25.24) 5.96,25.24 ; v2(3.26,31.24) 3.96,31.24 ; v2(3.26,31.24) 3.26,31.94 ; v2(3.26,31.24) 2.57,31.24 ; v2(3.26,31.24) 3.26,30.55 ; 8.57,39.24 v2(9.26,39.24) ; v2(9.26,39.24) 9.26,38.55 ; v2(9.26,39.24) 9.96,39.24 ; v2(9.26,39.24) 9.26,39.94 ; v2(5.26,71.24) 5.26,71.94 ; v2(5.26,71.24) 5.26,70.55 ; v2(5.26,71.24) 4.57,71.24 ; v2(5.26,71.24) 5.96,71.24 ; v2(55.26,95.24) 55.96,95.24 ; v2(55.26,95.24) 55.26,94.55 ; v2(55.26,95.24) 55.26,95.94 ; v2(55.26,95.24) 54.57,95.24 ; 56.89,27.68 J14.12 ; J14.12 58.35,27.68 ; J14.12 56.89,29.14 ; J14.12 58.35,29.14 ; 6.57,37.24 v2(7.26,37.24) ; v2(7.26,37.24) 7.26,36.55 ; v2(7.26,37.24) 7.96,37.24 ; v2(7.26,37.24) 7.26,37.94 ; 47.26,2.55 v2(47.26,3.24) ; v2(47.26,3.24) 46.57,3.24 ; v2(47.26,3.24) 47.96,3.24 ; v2(47.26,3.24) 47.26,3.94 ; v2(7.26,39.24) 7.96,39.24 ; v2(7.26,39.24) 7.26,39.94 ; v2(7.26,39.24) 7.26,38.55 ; v2(7.26,39.24) 6.57,39.24 ; 3.26,20.55 v2(3.26,21.24) ; v2(3.26,21.24) 3.96,21.24 ; v2(3.26,21.24) 3.26,21.94 ; v2(3.26,21.24) 2.57,21.24 ; v2(43.26,93.24) 43.96,93.24 ; v2(43.26,93.24) 43.26,93.94 ; v2(43.26,93.24) 43.26,92.55 ; v2(43.26,93.24) 42.57,93.24 ; 59.26,88.55 v2(59.26,89.24) ; v2(59.26,89.24) 59.96,89.24 ; v2(59.26,89.24) 59.26,89.94 ; v2(59.26,89.24) 58.57,89.24 ; v2(11.26,17.24) 11.96,17.24 ; v2(11.26,17.24) 11.26,16.55 ; v2(11.26,17.24) 11.26,17.94 ; v2(11.26,17.24) 10.57,17.24 ; 82.57,57.24 v2(83.26,57.24) ; v2(83.26,57.24) 83.26,57.94 ; v2(83.26,57.24) 83.26,56.55 ; v2(83.26,57.24) 83.96,57.24 ; v2(71.26,95.24) 71.96,95.24 ; v2(71.26,95.24) 71.26,94.55 ; v2(71.26,95.24) 71.26,95.94 ; v2(71.26,95.24) 70.57,95.24 ; 89.26,16.55 v2(89.26,17.24) ; v2(89.26,17.24) 88.57,17.24 ; v2(89.26,17.24) 89.26,17.94 ; v2(89.26,17.24) 89.96,17.24 ; 89.26,18.55 v2(89.26,19.24) ; v2(89.26,19.24) 89.26,19.94 ; v2(89.26,19.24) 88.57,19.24 ; v2(89.26,19.24) 89.96,19.24 ; 11.26,12.55 v2(11.26,13.24) ; v2(11.26,13.24) 11.96,13.24 ; v2(11.26,13.24) 10.57,13.24 ; v2(11.26,13.24) 11.26,13.94 ; v2(3.26,77.24) 3.96,77.24 ; v2(3.26,77.24) 2.57,77.24 ; v2(3.26,77.24) 3.26,76.55 ; v2(3.26,77.24) 3.26,77.94 ; 39.26,14.55 v2(39.26,15.24) ; v2(39.26,15.24) 38.57,15.24 ; v2(39.26,15.24) 39.96,15.24 ; v2(39.26,15.24) 39.26,15.94 ; v2(39.26,89.24) 39.96,89.24 ; v2(39.26,89.24) 38.57,89.24 ; v2(39.26,89.24) 39.26,88.55 ; v2(39.26,89.24) 39.26,89.94 ; 84.57,77.24 v2(85.26,77.24) ; v2(85.26,77.24) 85.96,77.24 ; v2(85.26,77.24) 85.26,76.55 ; v2(85.26,77.24) 85.26,77.94 ; 81.26,36.55 v2(81.26,37.24) ; v2(81.26,37.24) 81.26,37.94 ; v2(81.26,37.24) 80.57,37.24 ; v2(81.26,37.24) 81.96,37.24 ; 49.26,2.55 v2(49.26,3.24) ; v2(49.26,3.24) 48.57,3.24 ; v2(49.26,3.24) 49.96,3.24 ; v2(49.26,3.24) 49.26,3.94 ; 93.26,26.55 v2(93.26,27.24) ; v2(93.26,27.24) 93.26,27.94 ; v2(93.26,27.24) 92.57,27.24 ; 4.57,81.24 v2(5.26,81.24) ; v2(5.26,81.24) 5.26,81.94 ; v2(5.26,81.24) 5.96,81.24 ; v2(5.26,81.24) 5.26,80.55 ; 13.26,40.55 v2(13.26,41.24) ; v2(13.26,41.24) 13.26,41.94 ; v2(13.26,41.24) 13.96,41.24 ; v2(13.26,41.24) 12.57,41.24 ; v2(45.26,81.24) 45.96,81.24 ; v2(45.26,81.24) 45.26,81.94 ; v2(45.26,81.24) 44.57,81.24 ; v2(45.26,81.24) 45.26,80.55 ; v2(93.26,77.24) 93.26,77.94 ; v2(93.26,77.24) 93.26,76.55 ; v2(93.26,77.24) 93.96,77.24 ; v2(93.26,77.24) 92.57,77.24 ; v2(15.26,9.24) 15.96,9.24 ; v2(15.26,9.24) 15.26,9.94 ; v2(15.26,9.24) 15.26,8.55 ; v2(15.26,9.24) 14.57,9.24 ; 8.57,79.24 v2(9.26,79.24) ; v2(9.26,79.24) 9.26,79.94 ; v2(9.26,79.24) 9.26,78.55 ; v2(9.26,79.24) 9.96,79.24 ; 44.57,95.24 v2(45.26,95.24) ; v2(45.26,95.24) 45.96,95.24 ; v2(45.26,95.24) 45.26,95.94 ; v2(45.26,95.24) 45.26,94.55 ; 36.57,25.14 J13.13 ; J13.13 38.03,25.14 ; J13.13 36.57,26.6 ; J13.13 38.03,26.6 ; v2(63.26,89.24) 63.96,89.24 ; v2(63.26,89.24) 63.26,89.94 ; v2(63.26,89.24) 62.57,89.24 ; v2(63.26,89.24) 63.26,88.55 ; J19.3 97.72,3.55 ; J19.3 96.26,5.01 ; J19.3 96.26,3.55 ; J19.3 97.72,5.01 ; 53.26,4.55 v2(53.26,5.24) ; v2(53.26,5.24) 52.57,5.24 ; v2(53.26,5.24) 53.96,5.24 ; v2(79.26,95.24) 79.96,95.24 ; v2(79.26,95.24) 79.26,95.94 ; v2(79.26,95.24) 78.57,95.24 ; v2(79.26,95.24) 79.26,94.55 ; v2(5.26,73.24) 5.26,73.94 ; v2(5.26,73.24) 4.57,73.24 ; v2(5.26,73.24) 5.26,72.55 ; v2(5.26,73.24) 5.96,73.24 ; v2(39.26,17.24) 39.96,17.24 ; v2(39.26,17.24) 38.57,17.24 ; v2(39.26,17.24) 39.26,16.55 ; v2(39.26,17.24) 39.26,17.94 ; 52.57,95.24 v2(53.26,95.24) ; v2(53.26,95.24) 53.26,95.94 ; v2(53.26,95.24) 53.96,95.24 ; v2(53.26,95.24) 53.26,94.55 ; v2(11.26,9.24) 11.96,9.24 ; v2(11.26,9.24) 11.26,9.94 ; v2(11.26,9.24) 10.57,9.24 ; v2(11.26,9.24) 11.26,8.55 ; 26.57,69.24 v2(27.26,69.24) ; v2(27.26,69.24) 27.26,69.94 ; v2(27.26,69.24) 27.26,68.55 ; 42.57,95.24 v2(43.26,95.24) ; v2(43.26,95.24) 43.26,95.94 ; v2(43.26,95.24) 43.96,95.24 ; v2(43.26,95.24) 43.26,94.55 ; 10.57,85.24 v2(11.26,85.24) ; v2(11.26,85.24) 11.26,84.55 ; v2(11.26,85.24) 11.26,85.94 ; v2(11.26,85.24) 11.96,85.24 ; v2(5.26,41.24) 5.26,41.94 ; v2(5.26,41.24) 5.26,40.55 ; v2(5.26,41.24) 4.57,41.24 ; v2(5.26,41.24) 5.96,41.24 ; 4.57,85.24 v2(5.26,85.24) 5.26,84.55 ; v2(9.26,85.24) 9.26,85.94 ; v2(9.26,85.24) 9.26,84.55 ; v2(9.26,85.24) 8.57,85.24 ; v2(9.26,85.24) 9.96,85.24 ; v2(3.26,39.24) 3.96,39.24 ; v2(3.26,39.24) 2.57,39.24 ; v2(3.26,39.24) 3.26,38.55 ; v2(3.26,39.24) 3.26,39.94 ; 91.26,36.55 v2(91.26,37.24) ; v2(91.26,37.24) 90.57,37.24 ; v2(91.26,37.24) 91.26,37.94 ; 17.26,38.55 v2(17.26,39.24) ; v2(17.26,39.24) 16.57,39.24 ; v2(17.26,39.24) 17.26,39.94 ; v2(17.26,39.24) 17.96,39.24 ; v2(69.26,87.24) 69.26,87.94 ; v2(69.26,87.24) 69.96,87.24 ; v2(69.26,87.24) 69.26,86.55 ; v2(69.26,87.24) 68.57,87.24 ; 14.57,3.24 v2(15.26,3.24) ; v2(15.26,3.24) 15.26,3.94 ; v2(15.26,3.24) 15.26,2.55 ; v2(15.26,3.24) 15.96,3.24 ; v2(11.26,37.24) 11.26,37.94 ; v2(11.26,37.24) 10.57,37.24 ; v2(11.26,37.24) 11.96,37.24 ; v2(11.26,37.24) 11.26,36.55 ; v2(57.26,81.24) 57.96,81.24 ; v2(57.26,81.24) 57.26,81.94 ; v2(57.26,81.24) 56.57,81.24 ; v2(57.26,81.24) 57.26,80.55 ; 71.59,61.75 v2(71.59,62.45) ; v2(71.59,62.45) 71.59,63.14 ; v2(71.59,62.45) 70.89,62.45 ; v2(71.59,62.45) 72.29,62.45 ; 76.16,57.18 v2(76.16,57.87) ; v2(76.16,57.87) 75.46,57.87 ; v2(76.16,57.87) 76.86,57.87 ; v2(76.16,57.87) 76.16,58.57 ; v2(59.26,79.24) 59.26,79.94 ; v2(59.26,79.24) 58.57,79.24 ; v2(59.26,79.24) 59.26,78.55 ; v2(59.26,79.24) 59.96,79.24 ; v2(9.26,81.24) 9.96,81.24 ; v2(9.26,81.24) 9.26,80.55 ; v2(9.26,81.24) 8.57,81.24 ; v2(45.26,93.24) 45.96,93.24 ; v2(45.26,93.24) 45.26,92.55 ; v2(45.26,93.24) 44.57,93.24 ; v2(45.26,93.24) 45.26,93.94 ; v2(47.26,93.24) 47.26,93.94 ; v2(47.26,93.24) 47.26,92.55 ; v2(47.26,93.24) 47.96,93.24 ; v2(47.26,93.24) 46.57,93.24 ; v2(63.26,87.24) 63.96,87.24 ; v2(63.26,87.24) 63.26,87.94 ; v2(63.26,87.24) 62.57,87.24 ; v2(63.26,87.24) 63.26,86.55 ; v2(93.26,17.24) 93.26,17.94 ; v2(93.26,17.24) 92.57,17.24 ; v2(93.26,17.24) 93.26,16.55 ; 34.57,77.24 v2(35.26,77.24) ; v2(35.26,77.24) 35.96,77.24 ; v2(35.26,77.24) 35.26,76.55 ; v2(35.26,77.24) 35.26,77.94 ; v2(21.26,39.24) 21.26,39.94 ; v2(21.26,39.24) 21.26,38.55 ; v2(21.26,39.24) 21.96,39.24 ; v2(21.26,39.24) 20.57,39.24 ; 45.26,12.55 v2(45.26,13.24) ; v2(45.26,13.24) 45.26,13.94 ; v2(45.26,13.24) 45.96,13.24 ; v2(45.26,13.24) 44.57,13.24 ; 5.26,30.55 v2(5.26,31.24) ; v2(5.26,31.24) 4.57,31.24 ; v2(5.26,31.24) 5.26,31.94 ; v2(5.26,31.24) 5.96,31.24 ; v2(63.26,81.24) 63.26,81.94 ; v2(63.26,81.24) 62.57,81.24 ; v2(63.26,81.24) 63.26,80.55 ; v2(63.26,81.24) 63.96,81.24 ; 17.26,40.55 v2(17.26,41.24) ; v2(17.26,41.24) 17.96,41.24 ; v2(17.26,41.24) 17.26,41.94 ; v2(17.26,41.24) 16.57,41.24 ; 69.26,88.55 v2(69.26,89.24) ; v2(69.26,89.24) 69.96,89.24 ; v2(69.26,89.24) 69.26,89.94 ; v2(69.26,89.24) 68.57,89.24 ; v2(7.26,41.24) 7.96,41.24 ; v2(7.26,41.24) 6.57,41.24 ; v2(7.26,41.24) 7.26,41.94 ; v2(7.26,41.24) 7.26,40.55 ; 53.26,92.55 v2(53.26,93.24) ; v2(53.26,93.24) 52.57,93.24 ; v2(53.26,93.24) 53.26,93.94 ; v2(53.26,93.24) 53.96,93.24 ; 4.57,83.24 v2(5.26,83.24) ; v2(5.26,83.24) 5.26,83.94 ; v2(5.26,83.24) 5.26,82.55 ; v2(5.26,83.24) 5.96,83.24 ; 5.26,36.55 v2(5.26,37.24) ; v2(5.26,37.24) 4.57,37.24 ; v2(5.26,37.24) 5.26,37.94 ; v2(5.26,37.24) 5.96,37.24 ; v2(81.26,95.24) 81.96,95.24 ; v2(81.26,95.24) 80.57,95.24 ; v2(81.26,95.24) 81.26,94.55 ; v2(81.26,95.24) 81.26,95.94 ; v2(71.26,79.24) 71.96,79.24 ; v2(71.26,79.24) 71.26,78.55 ; v2(71.26,79.24) 70.57,79.24 ; v2(3.26,81.24) 3.26,81.94 ; v2(3.26,81.24) 2.57,81.24 ; v2(3.26,81.24) 3.26,80.55 ; v2(3.26,81.24) 3.96,81.24 ; v2(65.26,81.24) 65.26,81.94 ; v2(65.26,81.24) 65.26,80.55 ; v2(65.26,81.24) 64.57,81.24 ; v2(65.26,81.24) 65.96,81.24 ; 39.26,12.55 v2(39.26,13.24) ; v2(39.26,13.24) 39.96,13.24 ; v2(39.26,13.24) 39.26,13.94 ; v2(39.26,13.24) 38.57,13.24 ; 11.26,14.55 v2(11.26,15.24) ; v2(11.26,15.24) 11.26,15.94 ; v2(11.26,15.24) 10.57,15.24 ; v2(11.26,15.24) 11.96,15.24 ; 60.16,45.43 v1(60.16,45.94) ; v1(60.16,45.94) 59.65,45.94 ; v1(60.16,45.94) 60.67,45.94 ; v2(13.26,11.24) 13.96,11.24 ; v2(13.26,11.24) 13.26,11.94 ; v2(13.26,11.24) 12.57,11.24 ; v2(13.26,11.24) 13.26,10.55 ; 91.26,26.55 v2(91.26,27.24) ; v2(91.26,27.24) 91.26,27.94 ; v2(91.26,27.24) 91.96,27.24 ; v2(91.26,27.24) 90.57,27.24 ; 21.26,36.55 v2(21.26,37.24) ; v2(21.26,37.24) 20.57,37.24 ; v2(21.26,37.24) 21.96,37.24 ; v2(21.26,37.24) 21.26,37.94 ; 91.26,34.55 v2(91.26,35.24) ; v2(91.26,35.24) 91.26,35.94 ; v2(91.26,35.24) 90.57,35.24 ; v2(83.26,77.24) 83.26,77.94 ; v2(83.26,77.24) 82.57,77.24 ; v2(83.26,77.24) 83.26,76.55 ; v2(83.26,77.24) 83.96,77.24 ; v2(13.26,13.24) 13.96,13.24 ; v2(13.26,13.24) 12.57,13.24 ; v2(13.26,13.24) 13.26,12.55 ; v2(13.26,13.24) 13.26,13.94 ; 89.26,56.55 v2(89.26,57.24) ; v2(89.26,57.24) 89.26,57.94 ; v2(89.26,57.24) 89.96,57.24 ; J6.3 18.98,91.18 ; J6.3 17.52,92.64 ; J6.3 18.98,92.64 ; J6.3 17.52,91.18 ; 14.57,13.24 v2(15.26,13.24) ; v2(15.26,13.24) 15.26,12.55 ; v2(15.26,13.24) 15.26,13.94 ; v2(15.26,13.24) 15.96,13.24 ; 95.72,64.03 v2(95.72,64.73)
